# EAGLE board Open-Controller-Unitary_V1 (EAGLE 9.1.0), part 1 of 3
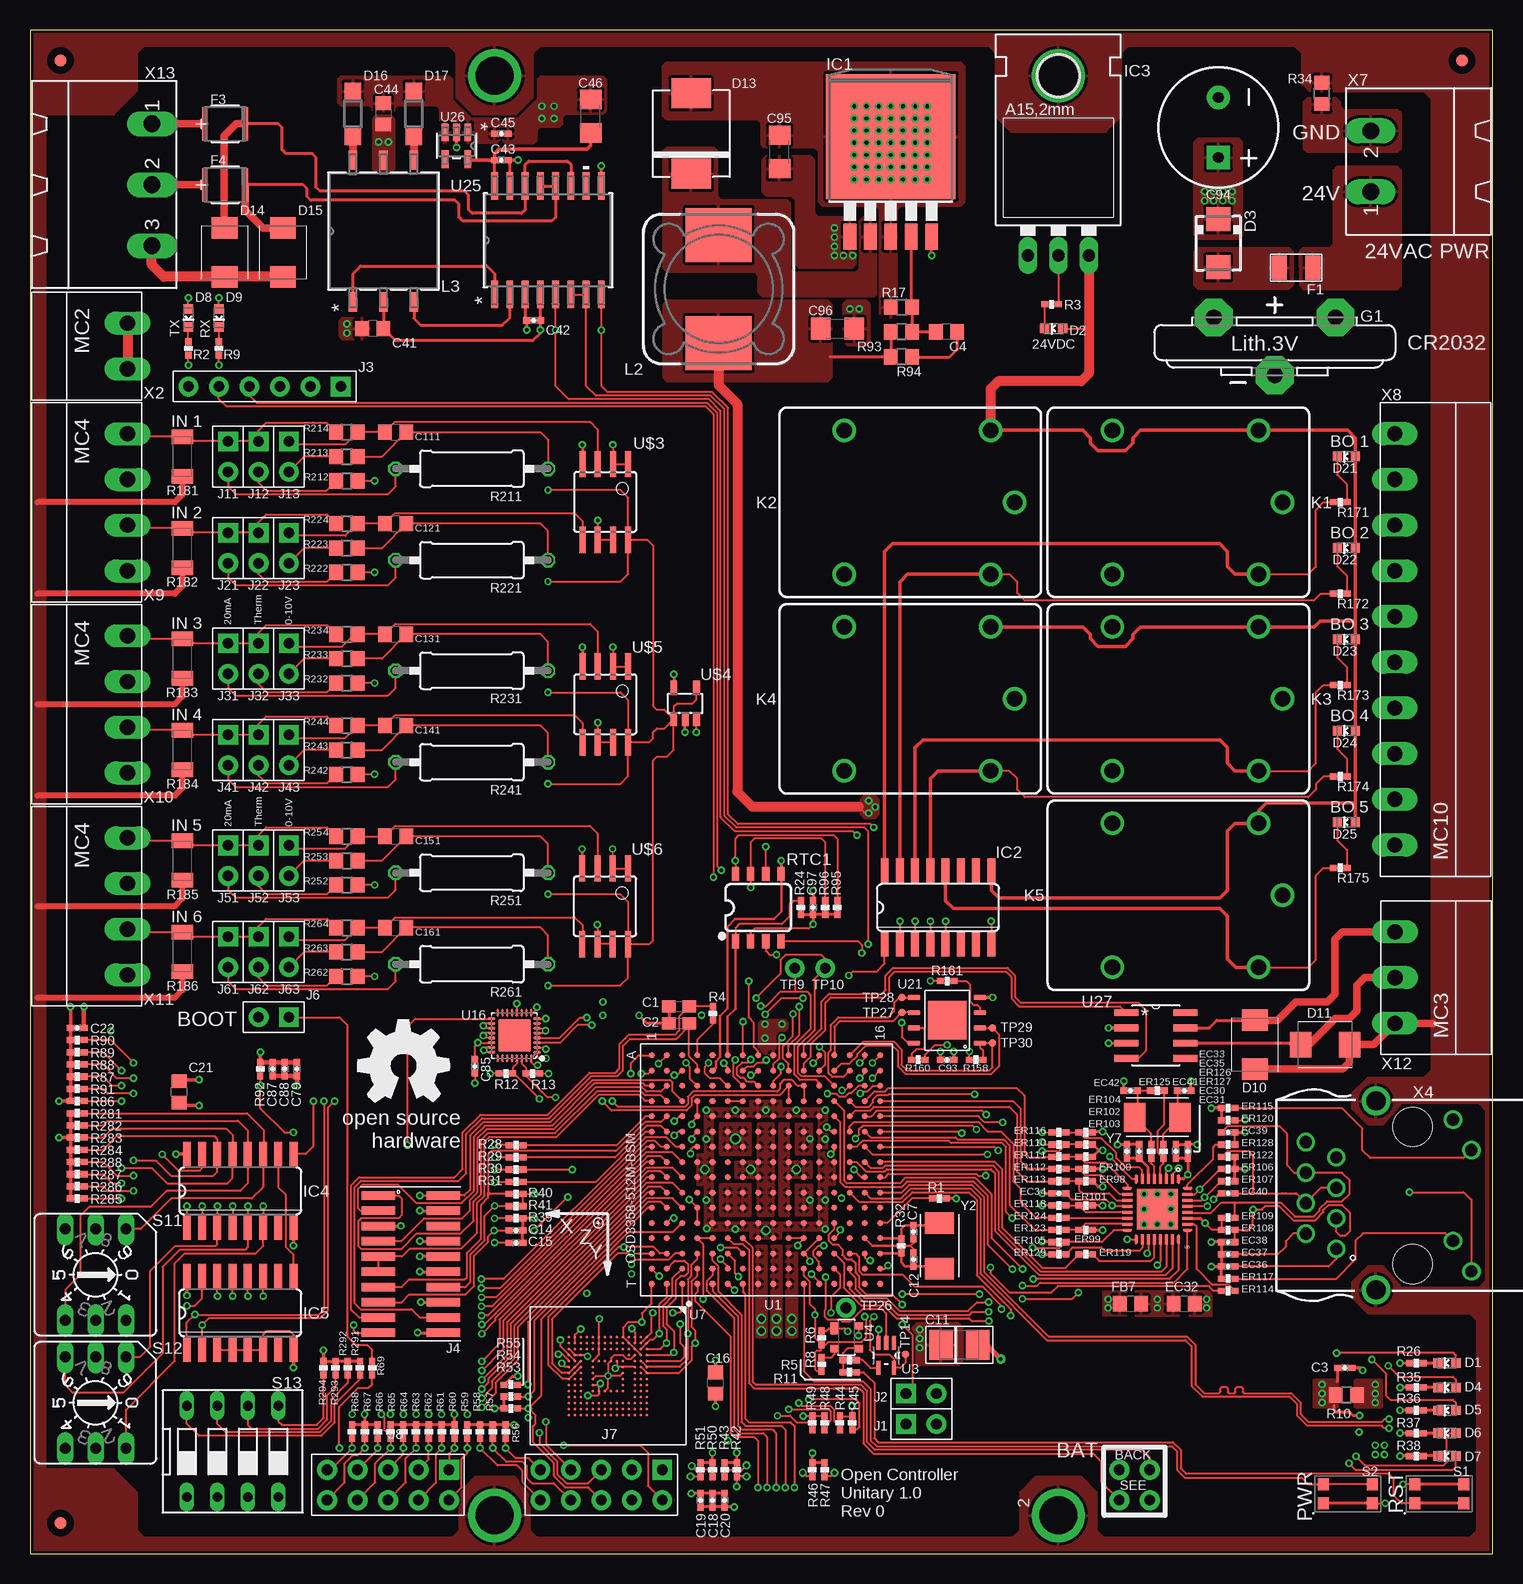
[diagram p0: board, top side]
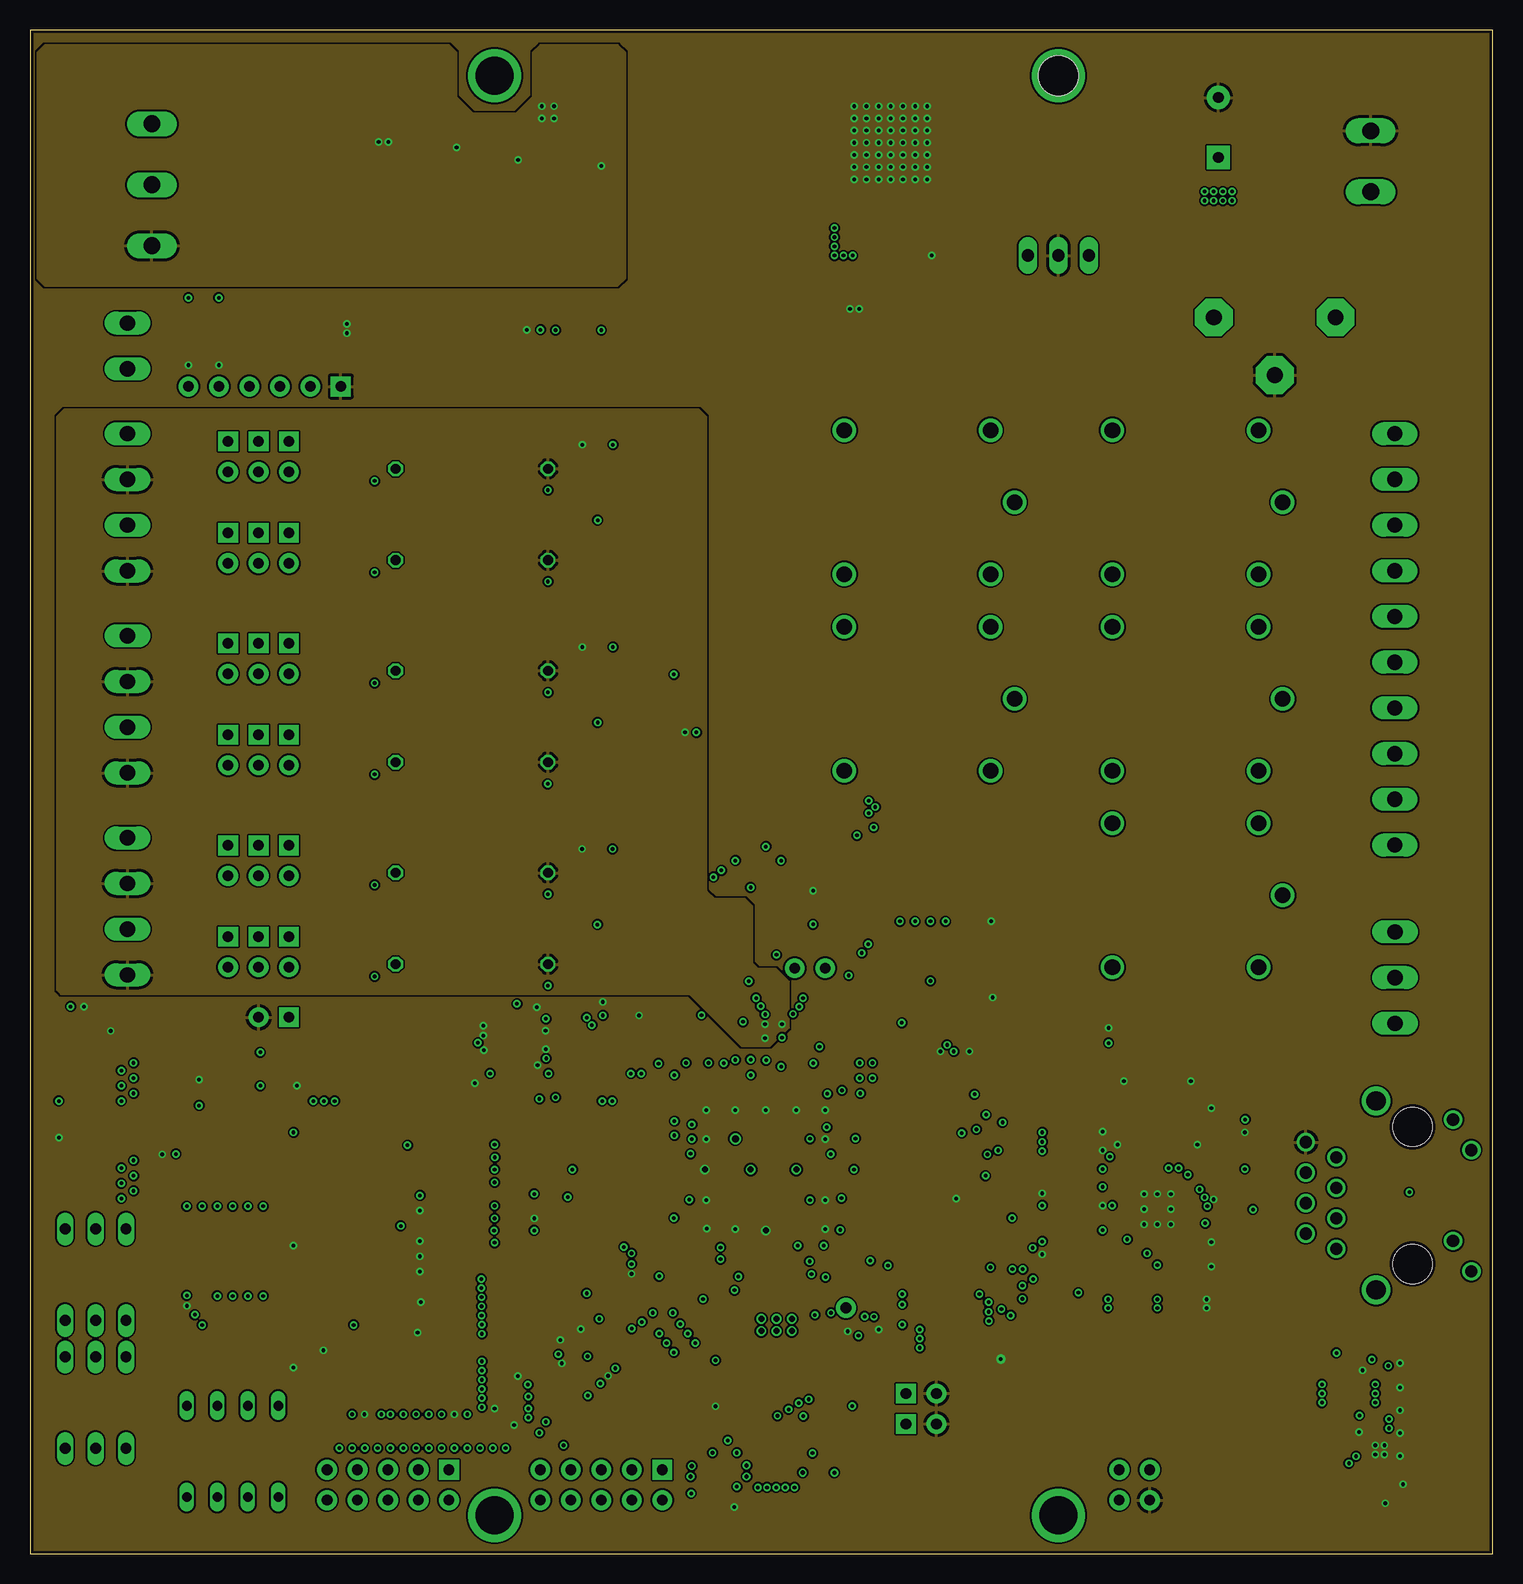
[diagram p1: board, inner layer Route2]
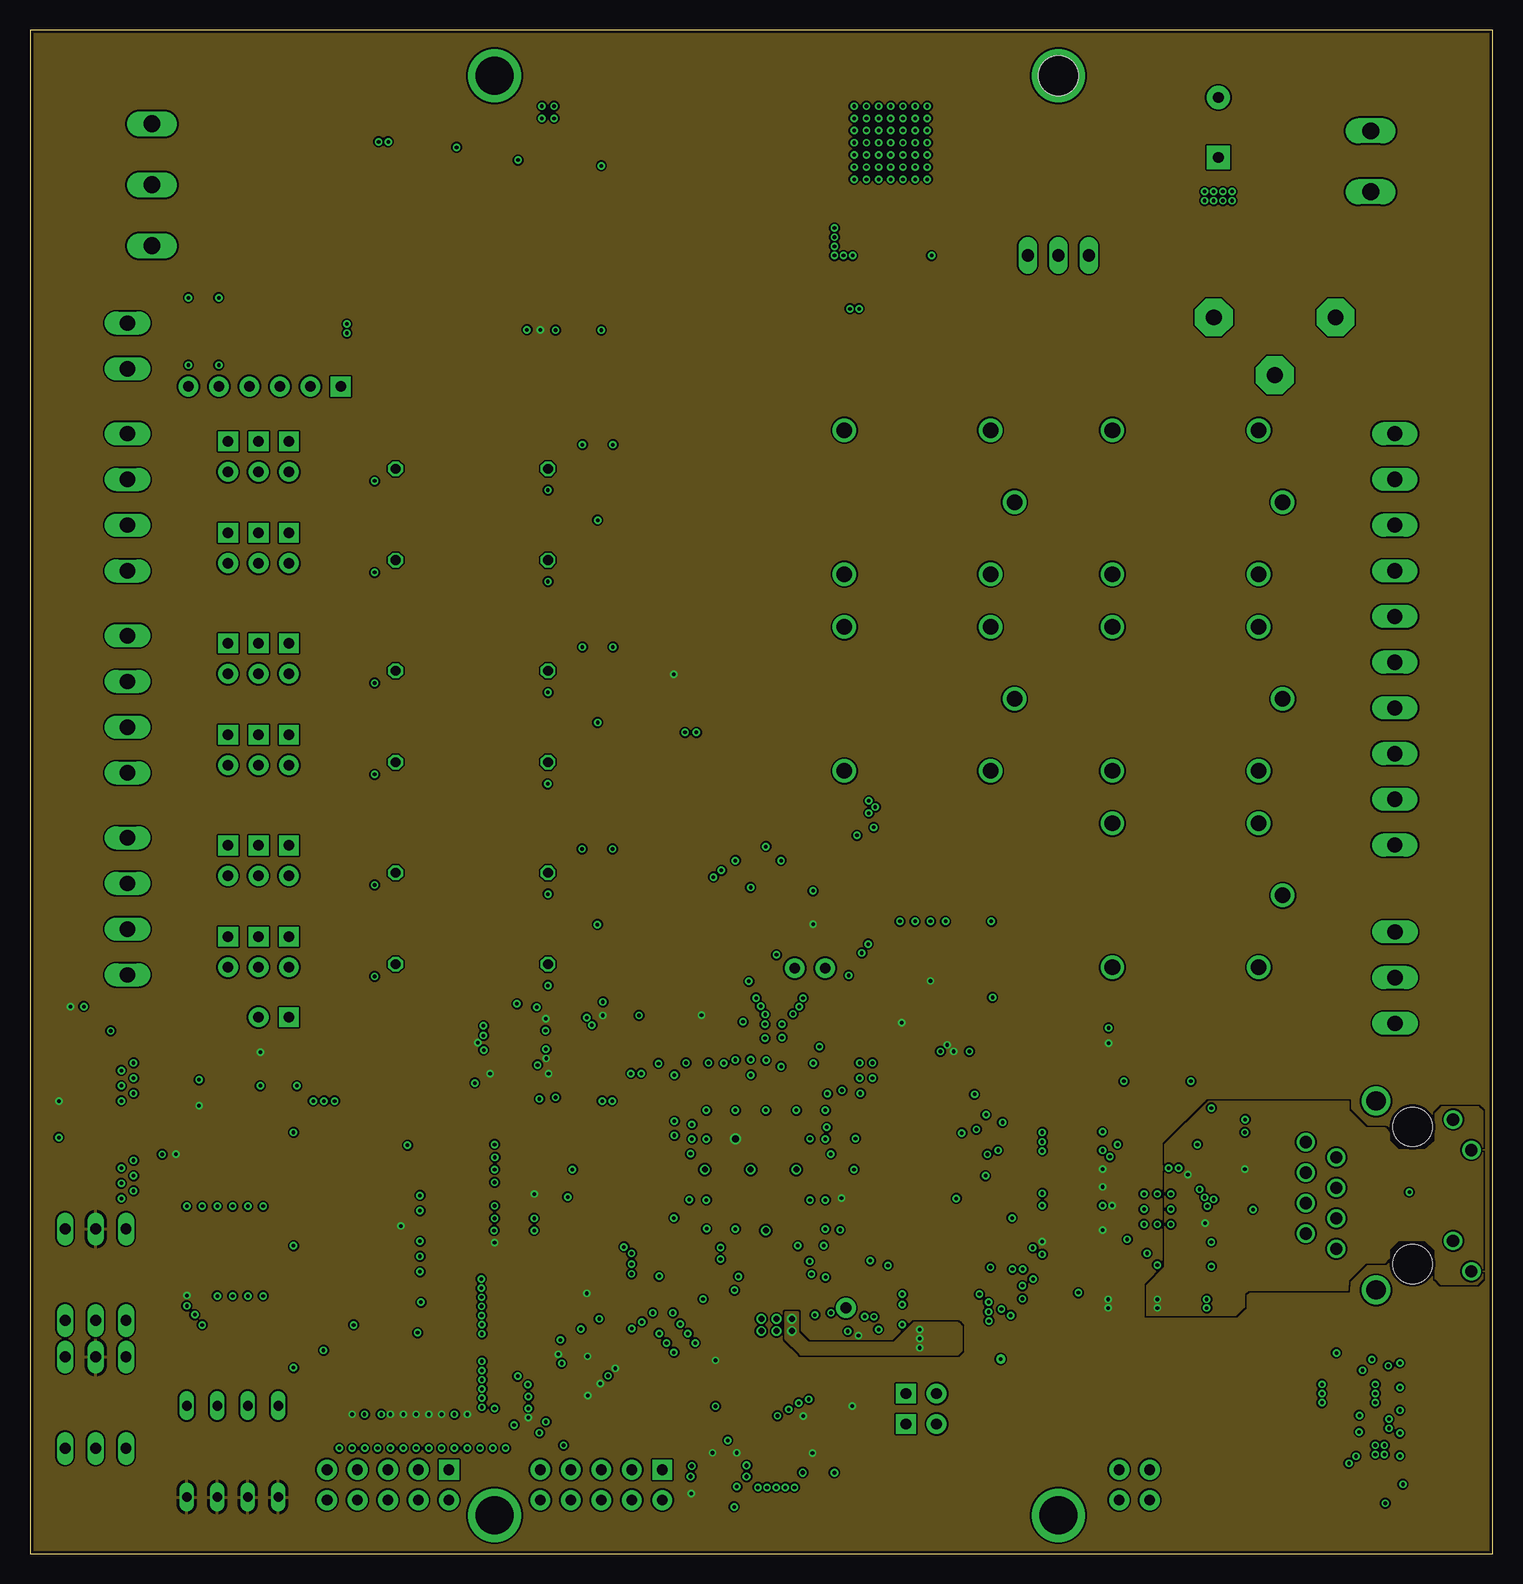
[diagram p2: board, inner layer Route15]
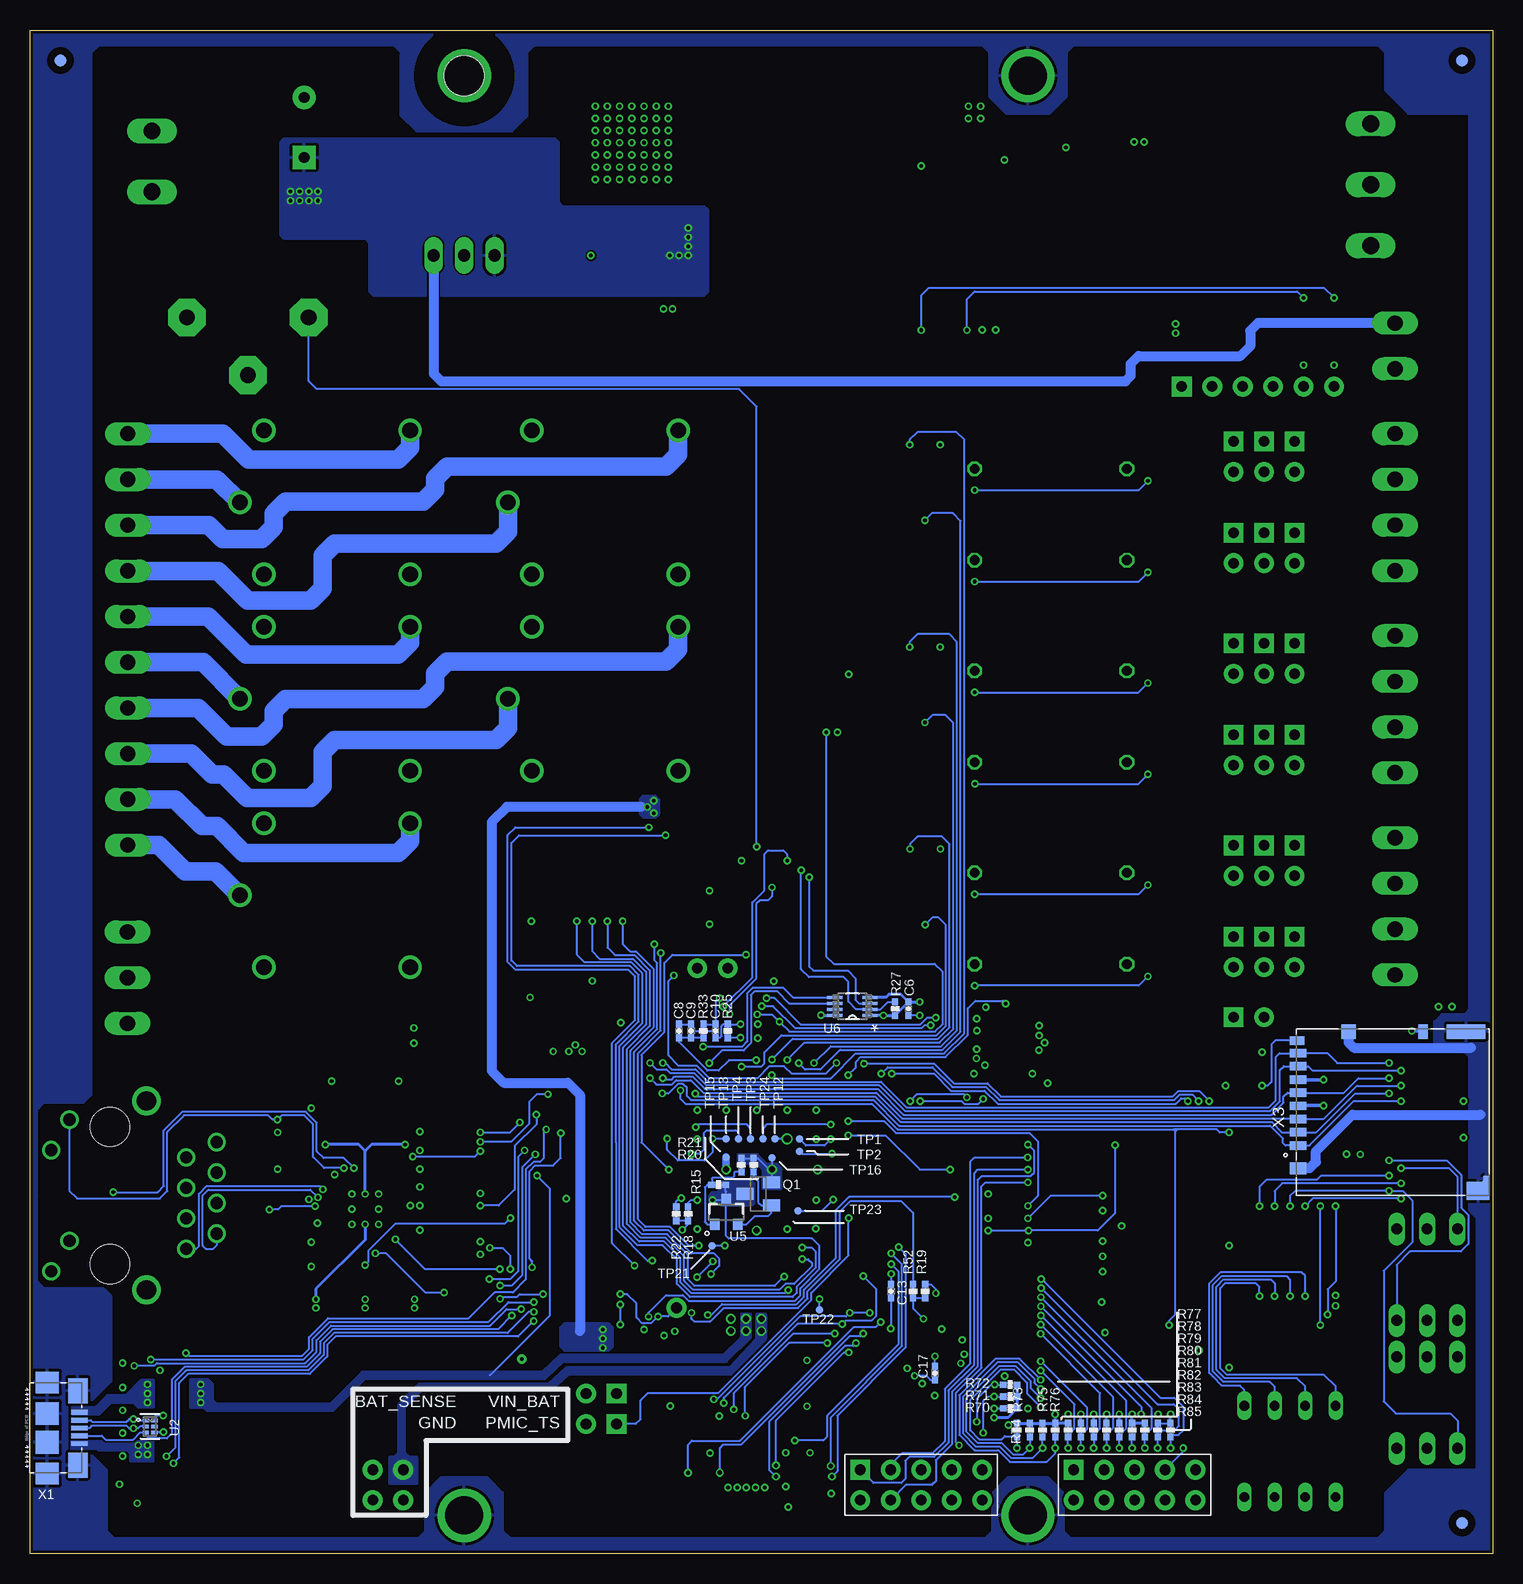
[diagram p3: board, bottom side, seen from below]

Size 121.92 x 127 mm. Coordinates in mm from the lower left corner, seen from the top.
Outline: 0,0 121.92,0 121.92,127 0,127 0,0
Copper layers (1*2*15*16): Top 0.035mm / dielectric 0.23mm / Route2 0.035mm / dielectric 0.93mm / Route15 0.035mm / dielectric 0.23mm / Bottom 0.035mm
Design rules "MF_Standard_4_Layer *": minimum track width 6mil, minimum drill 12mil, track to track 6mil, track to pad 6mil, pad to pad 6mil, via to via 6mil, smd to smd 0mil, copper to edge 10mil, drill to drill 10mil, minimum pad ring 6mil, minimum via ring 6mil, stop-mask expansion 2mil, vias tented up to drill 25mil, thermal gap 10mil
Net classes: 0 default: width 0.127 mm, drill 0.254 mm; 1 ground: width 0.152 mm, drill 0.254 mm, clearance 0.152 mm

## Footprints (pad centres in the part's own frame; a part is rotated, then mirrored left to right if it is on the bottom)
C0603 = smd 1.1 x 1: 1 -0.85,0; 2 0.85,0
C0402 = smd 0.61 x 0.508: 1 -0.559,0; 2 0.559,0
C0805 = smd 1.143 x 1.27: 1 -0.889,0; 2 0.889,0
B/3528-21R = smd 1.95 x 2.5: + 1.525,0; - -1.525,0
1206 = smd 1.6 x 1.8: 1 -1.4,0; 2 1.4,0
CPOL-RADIAL-5MM-10MM = drill 0.9 pad 1.93 square: + 2.5,0 | drill 0.9 pad 1.93: - -2.5,0
EIA-STD = smd 0.787 x 0.787: 1 -0.749,0; 2 0.749,0
SMA = smd 2 x 2: A 2,0; C -2,0
SMBJ = smd 1.78 x 2.16: A 2.04,0; C -2.03,0
SMC = smd 2.5 x 3.3: A 3.35,0; C -3.35,0
SOD123 = smd 1.4 x 1.4: A 1.9,0; C -1.9,0
R0402 = smd 0.61 x 0.508: 1 -0.559,0; 2 0.559,0
F1206W = smd 1.27 x 2.032: 1 -1.397,0; 2 1.397,0
FUS_MICROSMD010F_TYCO = smd 0.457 x 2.794: 1 -1.689,0; 2 1.689,0
FIDUCIAL_40MIL = smd 1.016 x 1.016: P$1 0,0
CR2032V = drill 1.321 pad 3.15 octagon: + -2.54,-5.08; +@1 -2.54,5.08; - 2.286,0
TO263-5 = smd 1.067 x 2.159: 1 -3.404,-5.791; 2 -1.702,-5.791; 3 0,-5.791; 4 1.702,-5.791; 5 3.404,-5.791 | smd 10.8 x 10.41: 6 0,2.54
SO16 = smd 0.66 x 2.032: 1 -4.445,-3.073; 2 -3.175,-3.073; 3 -1.905,-3.073; 4 -0.635,-3.073; 5 0.635,-3.073; 6 1.905,-3.073; 7 3.175,-3.073; 8 4.445,-3.073; 9 4.445,3.073; 10 3.175,3.073; 11 1.905,3.073; 12 0.635,3.073; 13 -0.635,3.073; 14 -1.905,3.073; 15 -3.175,3.073; 16 -4.445,3.073
78XXL = drill 1.016 long: GND 0,-3.81; IN -2.54,-3.81; OUT 2.54,-3.81 | hole 3.302: 0,11.176
H2-2.54 = drill 0.889 pad 1.651 square: 1 0,1.27 | drill 0.889 pad 1.651: 2 0,-1.27
H6-2.54 = drill 0.889 pad 1.651 square: 1 0,6.35 | drill 0.889 pad 1.651: 2 0,3.81; 3 0,1.27; 4 0,-1.27; 5 0,-3.81; 6 0,-6.35
CTI-JTAG = smd 2.794 x 0.711: 1 -2.705,5.715; 2 2.705,5.715; 3 -2.705,4.445; 4 2.705,4.445; 5 -2.705,3.175; 6 2.705,3.175; 7 -2.705,1.905; 8 2.705,1.905; 9 -2.705,0.635; 10 2.705,0.635; 11 -2.705,-0.635; 12 2.705,-0.635; 13 -2.705,-1.905; 14 2.705,-1.905; 15 -2.705,-3.175; 16 2.705,-3.175; 17 -2.705,-4.445; 18 2.705,-4.445; 19 -2.705,-5.715; 20 2.705,-5.715
H2X5-2.54 = drill 0.889 pad 1.651 square: 1 -1.27,5.08 | drill 0.889 pad 1.651: 2 1.27,5.08; 3 -1.27,2.54; 4 1.27,2.54; 5 -1.27,0; 6 1.27,0; 7 -1.27,-2.54; 8 1.27,-2.54; 9 -1.27,-5.08; 10 1.27,-5.08
JS-M = drill 1.3: 1 6.7,6; 2 6.7,-6; C 8.7,0; NC -5.5,-6; NO -5.5,6
MSS1260 = smd 5.5 x 4.5: 1 0,4.5; 2 0,-4.5
IND_78253_MC = smd 1.6 x 0.686: 1 -5.905,2.54; 2 -5.905,0; 3 -5.905,-2.54; 4 5.905,-2.54; 5 5.905,0; 6 5.905,2.54
MOUNTING_HOLE = drill 3.175 pad 4.445: P$1 0,0
SOT23-BEC = smd 1 x 1.4: B -0.95,-1.1; C 0,1.1; E 0.95,-1.1
R0805 = smd 1.143 x 1.27: 1 -0.889,0; 2 0.889,0
CT/CN1206 = smd 1.2 x 1.8: 1 -1.65,0; 2 1.65,0
0309/12 = drill 0.813 octagon: 1 -6.35,0; 2 6.35,0
SO08 = smd 0.6 x 1.2: 1 -1.905,-2.8; 2 -0.635,-2.8; 3 0.635,-2.8; 4 1.905,-2.8; 5 1.905,2.8; 6 0.635,2.8; 7 -0.635,2.8; 8 -1.905,2.8
SW4SMD_63X161LS = smd 0.9 x 1: 1 2.05,0.8; 2 2.05,-0.8; 3 -2.05,0.8; 4 -2.05,-0.8
P101 = drill 0.914 long: 1 3.81,-2.54; 2 -3.81,2.54; 4 3.81,2.54; 8 -3.81,-2.54; C 3.81,0; C1 -3.81,0
DS-04 = drill 0.813 long: 1 -3.81,-3.81; 2 -1.27,-3.81; 3 1.27,-3.81; 4 3.81,-3.81; 5 3.81,3.81; 6 1.27,3.81; 7 -1.27,3.81; 8 -3.81,3.81
TP_B0,65 = smd 0.635 x 0.635: TP 0,0
TESTPAD/W_HOLE_1X1 = drill 0.889 pad 1.651: P$1 0,0
OSD335X-BGA-256 = smd 0.5 x 0.5: A1 -9.525,-9.525; A2 -9.525,-8.255; A3 -9.525,-6.985; A4 -9.525,-5.715; A5 -9.525,-4.445; A6 -9.525,-3.175; A7 -9.525,-1.905; A8 -9.525,-0.635; A9 -9.525,0.635; A10 -9.525,1.905; A11 -9.525,3.175; A12 -9.525,4.445; A13 -9.525,5.715; A14 -9.525,6.985; A15 -9.525,8.255; A16 -9.525,9.525; B1 -8.255,-9.525; B2 -8.255,-8.255; B3 -8.255,-6.985; B4 -8.255,-5.715; B5 -8.255,-4.445; B6 -8.255,-3.175; B7 -8.255,-1.905; B8 -8.255,-0.635; B9 -8.255,0.635; B10 -8.255,1.905; B11 -8.255,3.175; B12 -8.255,4.445; B13 -8.255,5.715; B14 -8.255,6.985; B15 -8.255,8.255; B16 -8.255,9.525; C1 -6.985,-9.525; C2 -6.985,-8.255; C3 -6.985,-6.985; C4 -6.985,-5.715; C5 -6.985,-4.445; C6 -6.985,-3.175; C7 -6.985,-1.905; C8 -6.985,-0.635; C9 -6.985,0.635; C10 -6.985,1.905; C11 -6.985,3.175; C12 -6.985,4.445; C13 -6.985,5.715; C14 -6.985,6.985; C15 -6.985,8.255; C16 -6.985,9.525; D1 -5.715,-9.525; D2 -5.715,-8.255; D3 -5.715,-6.985; D4 -5.715,-5.715; D5 -5.715,-4.445; D6 -5.715,-3.175; D7 -5.715,-1.905; D8 -5.715,-0.635; D9 -5.715,0.635; D10 -5.715,1.905; D11 -5.715,3.175; D12 -5.715,4.445; D13 -5.715,5.715; D14 -5.715,6.985; D15 -5.715,8.255; D16 -5.715,9.525; E1 -4.445,-9.525; E2 -4.445,-8.255; E3 -4.445,-6.985; E4 -4.445,-5.715; E5 -4.445,-4.445; E6 -4.445,-3.175; E7 -4.445,-1.905; E8 -4.445,-0.635; E9 -4.445,0.635; E10 -4.445,1.905; E11 -4.445,3.175; E12 -4.445,4.445; E13 -4.445,5.715; E14 -4.445,6.985; E15 -4.445,8.255; E16 -4.445,9.525; F1 -3.175,-9.525; F2 -3.175,-8.255; F3 -3.175,-6.985; F4 -3.175,-5.715; F5 -3.175,-4.445; F6 -3.175,-3.175; F7 -3.175,-1.905; F8 -3.175,-0.635; F9 -3.175,0.635; F10 -3.175,1.905; F11 -3.175,3.175; F12 -3.175,4.445; F13 -3.175,5.715; F14 -3.175,6.985; F15 -3.175,8.255; F16 -3.175,9.525; G1 -1.905,-9.525; G2 -1.905,-8.255; G3 -1.905,-6.985; G4 -1.905,-5.715; G5 -1.905,-4.445; G6 -1.905,-3.175; G7 -1.905,-1.905; G8 -1.905,-0.635; G9 -1.905,0.635; G10 -1.905,1.905; G11 -1.905,3.175; G12 -1.905,4.445; G13 -1.905,5.715; G14 -1.905,6.985; G15 -1.905,8.255; G16 -1.905,9.525; H1 -0.635,-9.525; H2 -0.635,-8.255; H3 -0.635,-6.985; H4 -0.635,-5.715; H5 -0.635,-4.445; H6 -0.635,-3.175; H7 -0.635,-1.905; H8 -0.635,-0.635; H9 -0.635,0.635; H10 -0.635,1.905; H11 -0.635,3.175; H12 -0.635,4.445; H13 -0.635,5.715; H14 -0.635,6.985; H15 -0.635,8.255; H16 -0.635,9.525; J1 0.635,-9.525; J2 0.635,-8.255; J3 0.635,-6.985; J4 0.635,-5.715; J5 0.635,-4.445; J6 0.635,-3.175; J7 0.635,-1.905; J8 0.635,-0.635; J9 0.635,0.635; J10 0.635,1.905; J11 0.635,3.175; J12 0.635,4.445; J13 0.635,5.715; J14 0.635,6.985; J15 0.635,8.255; J16 0.635,9.525; K1 1.905,-9.525; K2 1.905,-8.255; K3 1.905,-6.985; K4 1.905,-5.715; K5 1.905,-4.445; K6 1.905,-3.175; K7 1.905,-1.905; K8 1.905,-0.635; K9 1.905,0.635; K10 1.905,1.905; K11 1.905,3.175; K12 1.905,4.445; K13 1.905,5.715; K14 1.905,6.985; K15 1.905,8.255; K16 1.905,9.525; L1 3.175,-9.525; L2 3.175,-8.255; L3 3.175,-6.985; L4 3.175,-5.715; L5 3.175,-4.445; L6 3.175,-3.175; L7 3.175,-1.905; L8 3.175,-0.635; L9 3.175,0.635; L10 3.175,1.905; L11 3.175,3.175; L12 3.175,4.445; L13 3.175,5.715; L14 3.175,6.985; L15 3.175,8.255; L16 3.175,9.525; M1 4.445,-9.525; M2 4.445,-8.255; M3 4.445,-6.985; M4 4.445,-5.715; M5 4.445,-4.445; M6 4.445,-3.175; M7 4.445,-1.905; M8 4.445,-0.635; M9 4.445,0.635; M10 4.445,1.905; M11 4.445,3.175; M12 4.445,4.445; M13 4.445,5.715; M14 4.445,6.985; M15 4.445,8.255; M16 4.445,9.525; N1 5.715,-9.525; N2 5.715,-8.255; N3 5.715,-6.985; N4 5.715,-5.715; N5 5.715,-4.445; N6 5.715,-3.175; N7 5.715,-1.905; N8 5.715,-0.635; N9 5.715,0.635; N10 5.715,1.905; N11 5.715,3.175; N12 5.715,4.445; N13 5.715,5.715; N14 5.715,6.985; N15 5.715,8.255; N16 5.715,9.525; P1 6.985,-9.525; P2 6.985,-8.255; P3 6.985,-6.985; P4 6.985,-5.715; P5 6.985,-4.445; P6 6.985,-3.175; P7 6.985,-1.905; P8 6.985,-0.635; P9 6.985,0.635; P10 6.985,1.905; P11 6.985,3.175; P12 6.985,4.445; P13 6.985,5.715; P14 6.985,6.985; P15 6.985,8.255; P16 6.985,9.525; R1 8.255,-9.525; R2 8.255,-8.255; R3 8.255,-6.985; R4 8.255,-5.715; R5 8.255,-4.445; R6 8.255,-3.175; R7 8.255,-1.905; R8 8.255,-0.635; R9 8.255,0.635; R10 8.255,1.905; R11 8.255,3.175; R12 8.255,4.445; R13 8.255,5.715; R14 8.255,6.985; R15 8.255,8.255; R16 8.255,9.525; T1 9.525,-9.525; T2 9.525,-8.255; T3 9.525,-6.985; T4 9.525,-5.715; T5 9.525,-4.445; T6 9.525,-3.175; T7 9.525,-1.905; T8 9.525,-0.635; T9 9.525,0.635; T10 9.525,1.905; T11 9.525,3.175; T12 9.525,4.445; T13 9.525,5.715; T14 9.525,6.985; T15 9.525,8.255; T16 9.525,9.525
DRY6 = smd 0.55 x 0.3: 1 -0.355,0.5 | smd 0.52 x 0.3: 2 -0.37,0; 3 -0.37,-0.5; 4 0.37,-0.5; 5 0.37,0; 6 0.37,0.5
DCK5 = smd 1.168 x 0.356: 1 -1.041,0.65; 2 -1.041,0; 3 -1.041,-0.65; 4 1.041,-0.65; 5 1.041,0.65
SOT143-R = smd 1 x 0.7: 1 -0.75,-1 | smd 0.6 x 0.7: 2 0.95,-1; 3 0.95,1; 4 -0.95,1
SOT23-3 = smd 0.8 x 0.9: 1 -0.95,-1; 2 0.95,-1; 3 0,1.1
DCU8 = smd 1.27 x 0.254: 1 -1.473,0.749; 2 -1.473,0.249; 3 -1.473,-0.249; 4 -1.473,-0.749; 5 1.473,-0.749; 6 1.473,-0.249; 7 1.473,0.249; 8 1.473,0.749
MICRON_EMMC_153 = smd 0.245 x 0.245: A1 -3.25,3.25; A2 -2.75,3.25; A3 -2.25,3.25; A4 -1.75,3.25; A5 -1.25,3.25; A6 -0.75,3.25; A7 -0.25,3.25; A8 0.25,3.25; A9 0.75,3.25; A10 1.25,3.25; A11 1.75,3.25; A12 2.25,3.25; A13 2.75,3.25; A14 3.25,3.25; B1 -3.25,2.75; B2 -2.75,2.75; B3 -2.25,2.75; B4 -1.75,2.75; B5 -1.25,2.75; B6 -0.75,2.75; B7 -0.25,2.75; B8 0.25,2.75; B9 0.75,2.75; B10 1.25,2.75; B11 1.75,2.75; B12 2.25,2.75; B13 2.75,2.75; B14 3.25,2.75; C1 -3.25,2.25; C2 -2.75,2.25; C3 -2.25,2.25; C4 -1.75,2.25; C5 -1.25,2.25; C6 -0.75,2.25; C7 -0.25,2.25; C8 0.25,2.25; C9 0.75,2.25; C10 1.25,2.25; C11 1.75,2.25; C12 2.25,2.25; C13 2.75,2.25; C14 3.25,2.25; D1 -3.25,1.75; D2 -2.75,1.75; D3 -2.25,1.75; D4 -1.75,1.75; D12 2.25,1.75; D13 2.75,1.75; D14 3.25,1.75; E1 -3.25,1.25; E2 -2.75,1.25; E3 -2.25,1.25; E5 -1.25,1.25; E6 -0.75,1.25; E7 -0.25,1.25; E8 0.25,1.25; E9 0.75,1.25; E10 1.25,1.25; E12 2.25,1.25; E13 2.75,1.25; E14 3.25,1.25; F1 -3.25,0.75; F2 -2.75,0.75; F3 -2.25,0.75; F5 -1.25,0.75; F10 1.25,0.75; F12 2.25,0.75; F13 2.75,0.75; F14 3.25,0.75; G1 -3.25,0.25; G2 -2.75,0.25; G3 -2.25,0.25; G5 -1.25,0.25; G10 1.25,0.25; G12 2.25,0.25; G13 2.75,0.25; G14 3.25,0.25; H1 -3.25,-0.25; H2 -2.75,-0.25; H3 -2.25,-0.25; H5 -1.25,-0.25; H10 1.25,-0.25; H12 2.25,-0.25; H13 2.75,-0.25; H14 3.25,-0.25; J1 -3.25,-0.75; J2 -2.75,-0.75; J3 -2.25,-0.75; J5 -1.25,-0.75; J10 1.25,-0.75; J12 2.25,-0.75; J13 2.75,-0.75; J14 3.25,-0.75; K1 -3.25,-1.25; K2 -2.75,-1.25; K3 -2.25,-1.25; K5 -1.25,-1.25; K6 -0.75,-1.25; K7 -0.25,-1.25; K8 0.25,-1.25; K9 0.75,-1.25; K10 1.25,-1.25; K12 2.25,-1.25; K13 2.75,-1.25; K14 3.25,-1.25; L1 -3.25,-1.75; L2 -2.75,-1.75; L3 -2.25,-1.75; L12 2.25,-1.75; L13 2.75,-1.75; L14 3.25,-1.75; M1 -3.25,-2.25; M2 -2.75,-2.25; M3 -2.25,-2.25; M4 -1.75,-2.25; M5 -1.25,-2.25; M6 -0.75,-2.25; M7 -0.25,-2.25; M8 0.25,-2.25; M9 0.75,-2.25; M10 1.25,-2.25; M11 1.75,-2.25; M12 2.25,-2.25; M13 2.75,-2.25; M14 3.25,-2.25; N1 -3.25,-2.75; N2 -2.75,-2.75; N3 -2.25,-2.75; N4 -1.75,-2.75; N5 -1.25,-2.75; N6 -0.75,-2.75; N7 -0.25,-2.75; N8 0.25,-2.75; N9 0.75,-2.75; N10 1.25,-2.75; N11 1.75,-2.75; N12 2.25,-2.75; N13 2.75,-2.75; N14 3.25,-2.75; P1 -3.25,-3.25; P2 -2.75,-3.25; P3 -2.25,-3.25; P4 -1.75,-3.25; P5 -1.25,-3.25; P6 -0.75,-3.25; P7 -0.25,-3.25; P8 0.25,-3.25; P9 0.75,-3.25; P10 1.25,-3.25; P11 1.75,-3.25; P12 2.25,-3.25; P13 2.75,-3.25; P14 3.25,-3.25
LAN8710A-QFN32 = smd 0.254 x 0.838: 1 -1.751,-2.515; 2 -1.251,-2.515; 3 -0.751,-2.515; 4 -0.251,-2.515; 5 0.251,-2.515; 6 0.751,-2.515; 7 1.251,-2.515; 8 1.751,-2.515; 17 1.751,2.515; 18 1.251,2.515; 19 0.751,2.515; 20 0.251,2.515; 21 -0.251,2.515; 22 -0.751,2.515; 23 -1.251,2.515; 24 -1.751,2.515 | smd 0.838 x 0.254: 9 2.515,-1.751; 10 2.515,-1.251; 11 2.515,-0.751; 12 2.515,-0.251; 13 2.515,0.251; 14 2.515,0.751; 15 2.515,1.251; 16 2.515,1.751; 25 -2.515,1.751; 26 -2.515,1.251; 27 -2.515,0.751; 28 -2.515,0.251; 29 -2.515,-0.251; 30 -2.515,-0.751; 31 -2.515,-1.251; 32 -2.515,-1.751 | smd 3.404 x 3.404: 33 0,0
QFN32-0.4-4X4MM = smd 0.6 x 0.2: 1 -1.9,1.4; 2 -1.9,1; 3 -1.9,0.6; 4 -1.9,0.2; 5 -1.9,-0.2; 6 -1.9,-0.6; 7 -1.9,-1; 8 -1.9,-1.4; 17 1.9,-1.4; 18 1.9,-1; 19 1.9,-0.6; 20 1.9,-0.2; 21 1.9,0.2; 22 1.9,0.6; 23 1.9,1; 24 1.9,1.4 | smd 0.2 x 0.6: 9 -1.4,-1.9; 10 -1,-1.9; 11 -0.6,-1.9; 12 -0.2,-1.9; 13 0.2,-1.9; 14 0.6,-1.9; 15 1,-1.9; 16 1.4,-1.9; 25 1.4,1.9; 26 1,1.9; 27 0.6,1.9; 28 0.2,1.9; 29 -0.2,1.9; 30 -0.6,1.9; 31 -1,1.9; 32 -1.4,1.9 | smd 2.7 x 2.7: 33 0,0
W-PDFN-8 = smd 1.05 x 0.45: 1 -2.75,1.905; 2 -2.75,0.635; 3 -2.75,-0.635; 4 -2.75,-1.905; 5 2.75,-1.905; 6 2.75,-0.635; 7 2.75,0.635; 8 2.75,1.905 | smd 3.2 x 3.2: PAD 0,0
DW16 = smd 2.311 x 0.559: 1 -4.521,4.445; 2 -4.521,3.175; 3 -4.521,1.905; 4 -4.521,0.635; 5 -4.521,-0.635; 6 -4.521,-1.905; 7 -4.521,-3.175; 8 -4.521,-4.445; 9 4.521,-4.445; 10 4.521,-3.175; 11 4.521,-1.905; 12 4.521,-0.635; 13 4.521,0.635; 14 4.521,1.905; 15 4.521,3.175; 16 4.521,4.445
DBV5 = smd 1.473 x 0.559: 1 -1.118,0.95; 2 -1.118,0; 3 -1.118,-0.95; 4 1.118,-0.95; 5 1.118,0.95
BEAGLEBONE_BLUE_D8 = smd 1.981 x 0.559: 1 -2.464,1.905; 2 -2.464,0.635; 3 -2.464,-0.635; 4 -2.464,-1.905; 5 2.464,-1.905; 6 2.464,-0.635; 7 2.464,0.635; 8 2.464,1.905
SOIC8 = smd 0.5 x 2.2: 1 -1.905,-3.154; 2 -0.645,-3.154; 3 0.625,-3.154; 4 1.895,-3.154; 5 1.905,3.154; 6 0.635,3.154; 7 -0.635,3.154; 8 -1.905,3.154
SOT23-5 = smd 0.55 x 1.2: 1 -0.95,-1.3; 2 0,-1.3; 3 0.95,-1.3; 4 0.95,1.3; 5 -0.95,1.3
10118192-0001LF(MICRO-USB-B-AMPHENOL-FCI) = smd 1.8 x 1.9: CGND1 -3.8,0; CGND4 3.8,0 | smd 1.9 x 1.9: CGND2 -1.2,0; CGND3 1.2,0 | smd 2.1 x 1.6: CGND5 3.1,2.55; CGND6 -3.1,2.55 | smd 0.4 x 1.35: D+ 0,2.675; D- -0.65,2.675; GND 1.3,2.675; ID 0.65,2.675; VBUS -1.3,2.675
MC2 = drill 1.27 long: 1 -1.905,0; 2 1.905,0
DM3BT-DSF-PEJS = smd 0.7 x 1.4: 1 -3.2,15.95; 2 -2.1,15.95; 3 -1,15.95; 4 0.1,15.95; 5 1.2,15.95; 6 2.3,15.95; 7 3.4,15.95; 8 4.5,15.95 | smd 0.7 x 1.2: CD 5.55,16.05 | smd 0.5 x 0.5: CGND1 -6,0.25 | smd 1.5 x 1.9: CGND2 -7,0.95 | smd 0.21 x 0.21 rotated 45: CGND3 -6.25,0.5 | smd 1 x 1.4: CGND4 -5.1,15.95 | smd 1.2 x 1.2: CGND5 6.3,11.75 | smd 1.2 x 3.2: CGND6 6.3,1.95 | smd 1.2 x 0.8: GND 6.3,5.55
SI-50170 = drill 1.016 pad 1.524: 1 4.445,-6.413; 2 3.175,-8.954; 3 1.905,-6.413; 4 0.635,-8.954; 5 -0.635,-6.413; 6 -1.905,-8.954; 7 -3.175,-6.413; 8 -4.445,-8.954; A1 -6.325,3.315; A2 3.785,3.315; C1 -3.785,4.839; C2 6.325,4.839 | drill 1.6 pad 2.286: S1 -7.874,-3.111; S2 7.874,-3.111 | hole 3.251: -5.715,-0.064; 5.715,-0.064
MSTBA2 = drill 1.397 long: 1 -2.54,5.08; 2 2.54,5.08
MC10 = drill 1.27 long: 1 -17.145,0; 2 -13.335,0; 3 -9.525,0; 4 -5.715,0; 5 -1.905,0; 6 1.905,0; 7 5.715,0; 8 9.525,0; 9 13.335,0; 10 17.145,0
MC4 = drill 1.27 long: 1 -5.715,0; 2 -1.905,0; 3 1.905,0; 4 5.715,0
MC3 = drill 1.27 long: 1 -3.81,0; 2 0,0; 3 3.81,0
MSTBA3 = drill 1.397 long: 1 -5.08,5.08; 2 0,5.08; 3 5.08,5.08
CRYSTAL-TXC-7A = smd 1.788 x 2.413: P$1 1.9,0; P$2 -1.9,0

## Placement (x,y rotation side)
C1  DNI  [C0603]  54.1,45.59 0 top
C2  DNI  [C0603]  54.1,44.2 0 top
C3  0.1uF, 6.3V  [C0402]  109.6,15.49 0 top
C4  330pF, DNI  [C0805]  76.4,101.83 180 top
C6  0.1uF, 6.3V  [C0402]  48.69,45.42 270 bottom
C7  18pF, 50V  [C0402]  73.66,26.8 270 top
C8  1nF  [C0402]  67.82,43.56 90 bottom
C9  0.1uF, 6.3V  [C0402]  66.8,43.56 90 bottom
C10  0.1uF, 6.3V  [C0402]  64.77,43.56 270 bottom
C11  220uF, 6.3V  [B/3528-21R]  77.47,17.4 180 top
C12  18pF, 50V  [C0402]  73.66,24.51 90 top
C13  2.2uF, 6.3V  [C0402]  50.14,21.87 270 bottom
C14  0.1uF, 6.3V  [C0402]  40.51,26.92 0 top
C15  0.1uF, 6.3V  [C0402]  40.51,25.91 0 top
C16  10uF, 10V  [C0805]  57.15,14.22 90 top
C17  0.1uF, 6.3V  [C0402]  46.48,15.04 90 bottom
C18  0.1uF, 6.3V  [C0402]  56.9,4.45 90 top
C19  0.1uF, 6.3V  [C0402]  55.88,4.45 90 top
C20  0.1uF, 6.3V  [C0402]  57.91,4.45 90 top
C21  10uF, 10V  [C0805]  12.45,38.48 90 top
C22  0.1uF, 6.3V  [C0402]  3.94,43.81 0 top
C41  10uF, 16V  [C0805]  28.57,102.11 180 top
C42  0.1uF, 16V  [C0402]  41.99,102.79 180 top
C43  0.1uF, 16V  [C0402]  39.29,116.15 0 top
C44  10uF, 16V  [C0805]  29.46,120.02 270 top
C45  0.1uF, 16V  [C0402]  39.29,118.36 0 top
C46  4.7uF  [1206]  46.74,119.81 90 top
C79  0.1uF, 6.3V  [C0402]  22.25,40.39 270 top
C85  2200pF, 6.3V  [C0402]  37.08,40.61 270 top
C87  2200pF, 6.3V  [C0402]  20.22,40.39 270 top
C88  2200pF, 6.3V  [C0402]  21.23,40.39 270 top
C93  0.1uF, 6.3V  [C0402]  76.45,41.15 180 top
C94  1mF  [CPOL-RADIAL-5MM-10MM]  99.06,118.87 270 top
C95  4.7uF  [1206]  62.48,116.84 90 top
C96  4.7uF  [1206]  67.31,102.11 0 top
C97  0.1uF, 6.3V  [C0402]  65.28,53.85 90 top
C111  1uF  [C0805]  30.48,93.47 0 top
C121  1uF  [C0805]  30.48,85.85 0 top
C131  1uF  [C0805]  30.48,76.63 0 top
C141  1uF  [C0805]  30.48,69.01 0 top
C151  1uF  [C0805]  30.48,59.79 0 top
C161  1uF  [C0805]  30.48,52.17 0 top
D1  LTST-C191KFKT  [EIA-STD]  118.11,15.88 180 top
D2  LTST-C191KFKT  [EIA-STD]  85.34,102.11 180 top
D3  S1D  [SMA]  99.06,109.22 270 top
D4  LTST-C191KGKT  [EIA-STD]  118.11,13.84 180 top
D5  LTST-C191KGKT  [EIA-STD]  118.11,11.94 180 top
D6  LTST-C191KGKT  [EIA-STD]  118.11,10.03 180 top
D7  LTST-C191KGKT  [EIA-STD]  118.11,8.13 180 top
D8  LTST-C191KGKT  [EIA-STD]  13.21,103 270 top
D9  LTST-C191KFKT  [EIA-STD]  15.75,103 270 top
D10  SMBJ7.0CA  [SMBJ]  102.11,42.42 270 top
D11  SMBJ7.0CA  [SMBJ]  107.95,42.42 0 top
D13  B550C-13-F  [SMC]  55.12,118.36 90 top
D14  SMBJ12CA  [SMBJ]  16.23,108.46 270 top
D15  SMBJ12CA  [SMBJ]  21.08,108.46 270 top
D16  MBR0520LT  [SOD123]  26.92,120.02 270 top
D17  MBR0520LT  [SOD123]  32,120.02 270 top
D21  LTST-C191KFKT  [EIA-STD]  109.73,91.44 180 top
D22  LTST-C191KFKT  [EIA-STD]  109.73,83.82 180 top
D23  LTST-C191KFKT  [EIA-STD]  109.73,76.2 180 top
D24  LTST-C191KFKT  [EIA-STD]  109.73,68.58 180 top
D25  LTST-C191KFKT  [EIA-STD]  109.73,60.96 180 top
EC30  0.1uF, 6.3V  [C0402]  95.5,33.53 90 top
EC31  0.1uF, 6.3V  [C0402]  96.52,33.53 90 top
EC32  10uF, 10V  [C0805]  96.22,20.83 0 top
EC33  1uF, 10V  [C0402]  91.44,33.53 90 top
EC34  0.1uF, 6.3V  [C0402]  85.78,30.02 180 top
EC35  470pF, 6.3V  [C0402]  92.46,33.53 90 top
EC36  15pF, DNI  [C0402]  99.87,23.93 180 top
EC37  15pF, DNI  [C0402]  99.87,24.94 180 top
EC38  15pF, DNI  [C0402]  99.87,25.96 180 top
EC39  15pF, DNI  [C0402]  99.87,35.1 0 top
EC40  0.022uF, 10V  [C0402]  99.87,30.02 180 top
EC41  30pF, 50V  [C0402]  96.22,38.58 0 top
EC42  30pF, 50V  [C0402]  91.74,38.58 180 top
ER98  1.5K, 1%  [R0402]  88.01,31.04 180 top
ER99  1.5K, 1%  [R0402]  88.01,26.97 180 top
ER100  1.5K, 1%  [R0402]  88.01,32.05 180 top
ER101  10K, 1%  [R0402]  88.01,29.01 0 top
ER102  10K, 1%  [R0402]  88.01,34.09 0 top
ER103  10K, 1%  [R0402]  88.01,33.07 0 top
ER104  10K, 1%  [R0402]  88.01,35.1 0 top
ER105  1.5K, 1%  [R0402]  85.78,25.96 0 top
ER106  49.9, 1%  [R0402]  99.87,32.05 180 top
ER107  49.9, 1%  [R0402]  99.87,31.04 180 top
ER108  49.9, 1%  [R0402]  99.87,26.97 0 top
ER109  49.9, 1%  [R0402]  99.87,27.99 0 top
ER110  100, 1%  [R0402]  85.78,34.09 180 top
ER111  100, 1%  [R0402]  85.78,33.07 180 top
ER112  100, 1%  [R0402]  85.78,32.05 180 top
ER113  100, 1%  [R0402]  85.78,31.04 180 top
ER114  100, 1%  [R0402]  99.87,21.89 180 top
ER115  470, 1%  [R0402]  99.87,37.13 0 top
ER116  100, 1%  [R0402]  85.78,35.1 180 top
ER117  470, 1%  [R0402]  99.87,22.91 0 top
ER118  100, 1%  [R0402]  85.78,29.01 180 top
ER119  100, 1%  [R0402]  88.01,24.94 180 top
ER120  10K, 1%  [R0402]  99.87,36.12 0 top
ER122  0, 1%  [R0402]  99.87,33.07 180 top
ER123  100, 1%  [R0402]  85.78,26.97 180 top
ER124  100, 1%  [R0402]  85.78,27.99 180 top
ER125  1M, 1%, DNI  [R0402]  93.98,38.58 180 top
ER126  0, 1%  [R0402]  93.47,33.53 90 top
ER127  10, 1%  [R0402]  94.49,33.53 90 top
ER128  12.1K, 1%  [R0402]  99.87,34.09 180 top
ER129  10K, 1%  [R0402]  85.78,24.94 180 top
F1  4A Fuse  [F1206W]  105.54,107.19 180 top
F3  MICROSMD010F-2  [FUS_MICROSMD010F_TYCO]  16.26,119.18 0 top
F4  MICROSMD010F-2  [FUS_MICROSMD010F_TYCO]  16.26,114.1 0 top
FB7  150ohm, 800mA  [C0805]  91.74,20.83 0 top
FUD1  FIDUCIAL  [FIDUCIAL_40MIL]  2.54,124.46 180 top
FUD2  FIDUCIAL  [FIDUCIAL_40MIL]  2.54,2.54 180 top
FUD3  FIDUCIAL  [FIDUCIAL_40MIL]  119.38,124.46 180 top
FUD4  FIDUCIAL  [FIDUCIAL_40MIL]  2.54,2.54 270 bottom
FUD5  FIDUCIAL  [FIDUCIAL_40MIL]  119.38,124.46 270 bottom
FUD6  FIDUCIAL  [FIDUCIAL_40MIL]  2.54,124.46 270 bottom
G1  CR2032V  [CR2032V]  103.76,100.51 270 top
IC1  [TO263-5]  71.75,115.57 0 top
IC2  ULN2003AD  [SO16]  75.69,53.85 0 top
IC3  L7824CT  [78XXL]  85.72,112.01 0 top
IC4  74HC165D  [SO16]  17.53,30.23 0 top
IC5  74HC165D  [SO16]  17.53,20.07 0 top
J1  [H2-2.54]  74.3,10.79 90 top
J2  [H2-2.54]  74.3,13.34 90 top
J3  6p-2.54  [H6-2.54]  19.56,97.28 270 top
J4  CTI-JTAG  [CTI-JTAG]  31.75,24.13 0 top
J6  [H2-2.54]  20.32,44.7 270 top
J7  TH-2X5  [H2X5-2.54]  47.62,5.71 270 top
J8  TH-2X5  [H2X5-2.54]  29.84,5.71 270 top
J11  [H2-2.54]  16.51,91.44 0 top
J12  [H2-2.54]  19.05,91.44 0 top
J13  [H2-2.54]  21.59,91.44 0 top
J21  [H2-2.54]  16.51,83.82 0 top
J22  [H2-2.54]  19.05,83.82 0 top
J23  [H2-2.54]  21.59,83.82 0 top
J31  [H2-2.54]  16.51,74.6 0 top
J32  [H2-2.54]  19.05,74.6 0 top
J33  [H2-2.54]  21.59,74.6 0 top
J41  [H2-2.54]  16.51,66.98 0 top
J42  [H2-2.54]  19.05,66.98 0 top
J43  [H2-2.54]  21.59,66.98 0 top
J51  [H2-2.54]  16.51,57.76 0 top
J52  [H2-2.54]  19.05,57.76 0 top
J53  [H2-2.54]  21.59,57.76 0 top
J61  [H2-2.54]  16.51,50.14 0 top
J62  [H2-2.54]  19.05,50.14 0 top
J63  [H2-2.54]  21.59,50.14 0 top
K1  JS1-24V-F  [JS-M]  95.73,87.63 0 top
K2  JS1-24V-F  [JS-M]  73.38,87.63 0 top
K3  JS1-24V-F  [JS-M]  95.73,71.25 0 top
K4  JS1-24V-F  [JS-M]  73.38,71.25 0 top
K5  JS1-24V-F  [JS-M]  95.73,54.86 0 top
L2  [MSS1260]  57.4,105.41 0 top
L3  78253/55MVC-R  [IND_78253_MC]  29.46,110.24 90 top
MGT1  MOUNTING_HOLE  [MOUNTING_HOLE]  85.72,123.19 180 top
MGT2  MOUNTING_HOLE  [MOUNTING_HOLE]  38.73,123.19 180 top
MGT3  MOUNTING_HOLE  [MOUNTING_HOLE]  85.72,3.17 180 top
MGT4  MOUNTING_HOLE  [MOUNTING_HOLE]  38.73,3.17 180 top
Q1  MMBT2907  [SOT23-BEC]  61.21,29.97 90 bottom
R1  10K, 1%  [R0402]  75.82,29.59 0 top
R2  1.5K, 1%  [R0402]  13.21,100.46 270 top
R3  10K, 1%  [R0402]  85.17,104.14 0 top
R4  0, 1%  [R0402]  56.92,45.03 90 top
R5  0, 1%  [R0402]  68.33,16.13 180 top
R6  100K, 1%, DNI  [R0402]  65.99,17.98 270 top
R8  1K, 1%  [R0402]  65.99,15.77 90 top
R9  1.5K, 1%  [R0402]  15.75,100.46 270 top
R10  0, 1%  [R0805]  109.73,13.21 180 top
R11  0, 1%  [R0402]  68.33,15.11 180 top
R12  1.5K, 1%  [R0402]  39.67,40.01 180 top
R13  1.5K, 1%  [R0402]  41.91,40.01 0 top
R15  40.2K, 1%  [R0402]  64.52,30.73 180 bottom
R17  1.00K, 1%  [R0805]  72.64,103.89 0 top
R18  4.75K, 1%  [R0402]  67.06,28.32 270 bottom
R19  0, 1%  [R0402]  48.31,21.87 270 bottom
R20  10K, 1%  [R0402]  62.61,32.38 90 bottom
R21  499  [R0402]  61.59,32.38 90 bottom
R22  4.75K, 1%  [R0402]  68.05,28.32 90 bottom
R24  1.5K, 1%  [R0402]  64.26,53.85 90 top
R25  0, 1%  [R0402]  63.75,43.56 90 bottom
R26  1.5K, 1%  [R0402]  115.58,15.88 180 top
R27  100K, 1%  [R0402]  49.81,45.42 90 bottom
R28  0, 1%  [R0402]  40.51,34.04 180 top
R29  0, 1%  [R0402]  40.51,33.02 180 top
R30  0, 1%  [R0402]  40.51,32 180 top
R31  22, 1%  [R0402]  40.51,30.99 180 top
R32  1M, 1%  [R0402]  72.64,25.65 270 top
R33  0, 1%  [R0402]  65.79,43.56 90 bottom
R34  .1, 0805  [R0805]  107.7,121.72 90 top
R35  1.5K, 1%  [R0402]  115.57,13.84 180 top
R36  1.5K, 1%  [R0402]  115.57,11.94 180 top
R37  1.5K, 1%  [R0402]  115.57,10.03 180 top
R38  1.5K, 1%  [R0402]  115.57,8.13 180 top
R39  4.75K, 1%  [R0402]  40.51,27.94 180 top
R40  4.75K, 1%  [R0402]  40.51,29.97 0 top
R41  4.75K, 1%  [R0402]  40.51,28.96 0 top
R42  10K, 1%  [R0402]  58.93,6.99 90 top
R43  10K, 1%  [R0402]  57.91,6.99 90 top
R44  10K, 1%  [R0402]  67.51,10.9 90 top
R45  10K, 1%  [R0402]  68.55,10.9 90 top
R46  10K, 1%  [R0402]  65.23,6.99 90 top
R47  10K, 1%  [R0402]  66.24,6.99 90 top
R48  10K, 1%  [R0402]  66.24,10.9 90 top
R49  10K, 1%  [R0402]  65.23,10.9 90 top
R50  10K, 1%  [R0402]  56.9,6.99 90 top
R51  10K, 1%  [R0402]  55.88,6.99 90 top
R52  10K, 1%  [R0402]  47.29,21.87 90 bottom
R53  100K, 1%  [R0402]  40.08,12.09 0 top
R54  100K, 1%, DNI  [R0402]  40.08,13.08 0 top
R55  100K, 1%  [R0402]  40.08,14.07 0 top
R56  100K, 1%  [R0402]  39.65,10.16 270 top
R57  100K, 1%  [R0402]  38.58,10.16 270 top
R58  100K, 1%  [R0402]  37.52,10.16 270 top
R59  100K, 1%  [R0402]  36.45,10.16 270 top
R60  100K, 1%  [R0402]  35.38,10.16 270 top
R61  100K, 1%  [R0402]  34.32,10.16 270 top
R62  100K, 1%  [R0402]  33.25,10.16 270 top
R63  100K, 1%  [R0402]  32.18,10.16 270 top
R64  100K, 1%, DNI  [R0402]  31.11,10.16 270 top
R65  100K, 1%, DNI  [R0402]  30.05,10.16 270 top
R66  100K, 1%, DNI  [R0402]  28.98,10.16 270 top
R67  100K, 1%  [R0402]  27.91,10.16 270 top
R68  100K, 1%  [R0402]  26.85,10.16 270 top
R69  100, 1%  [R0402]  28.52,15.47 90 top
R70  100K, 1%, DNI  [R0402]  40.21,12.09 0 bottom
R71  100K, 1%  [R0402]  40.21,13.08 0 bottom
R72  100K, 1%, DNI  [R0402]  40.21,14.07 0 bottom
R73  100K, 1%, DNI  [R0402]  39.65,10.29 90 bottom
R74  100K, 1%, DNI  [R0402]  38.58,10.29 90 bottom
R75  100K, 1%, DNI  [R0402]  37.52,10.29 90 bottom
R76  100K, 1%, DNI  [R0402]  36.45,10.29 90 bottom
R77  100K, 1%, DNI  [R0402]  35.38,10.29 90 bottom
R78  100K, 1%, DNI  [R0402]  34.32,10.29 90 bottom
R79  100K, 1%, DNI  [R0402]  33.25,10.29 90 bottom
R80  100K, 1%, DNI  [R0402]  32.18,10.29 90 bottom
R81  100K, 1%  [R0402]  31.11,10.29 90 bottom
R82  100K, 1%  [R0402]  30.05,10.29 90 bottom
R83  100K, 1%  [R0402]  28.98,10.29 90 bottom
R84  100K, 1%, DNI  [R0402]  27.91,10.29 90 bottom
R85  100K, 1%, DNI  [R0402]  26.85,10.29 90 bottom
R86  10K, 1%  [R0402]  3.94,37.72 180 top
R87  10K, 1%  [R0402]  3.94,39.75 180 top
R88  10K, 1%  [R0402]  3.94,40.77 180 top
R89  10K, 1%  [R0402]  3.94,41.78 180 top
R90  10K, 1%  [R0402]  3.94,42.8 180 top
R91  10K, 1%  [R0402]  3.94,38.73 180 top
R92  10K, 1%  [R0402]  19.2,40.39 90 top
R93  3.09K, 1%  [R0805]  72.64,101.83 180 top
R94  100, 5% DNI  [R0805]  72.64,99.75 180 top
R95  1.5K, 1%  [R0402]  67.31,53.85 270 top
R96  1.5K, 1%  [R0402]  66.29,53.85 270 top
R158  100K, 1%  [R0402]  78.87,41.15 180 top
R160  10K, 1%  [R0402]  74.04,41.15 180 top
R161  10K, 1%  [R0402]  76.45,47.73 0 top
R171  10K, 1%  [R0402]  109.22,87.63 180 top
R172  10K, 1%  [R0402]  109.22,80.01 180 top
R173  10K, 1%  [R0402]  109.22,72.39 180 top
R174  10K, 1%  [R0402]  109.22,64.77 180 top
R175  10K, 1%  [R0402]  109.22,57.15 180 top
R181  47V 200A  [CT/CN1206]  12.7,91.44 270 top
R182  47V 200A  [CT/CN1206]  12.7,83.82 270 top
R183  47V 200A  [CT/CN1206]  12.7,74.6 270 top
R184  47V 200A  [CT/CN1206]  12.7,66.98 270 top
R185  47V 200A  [CT/CN1206]  12.7,57.76 270 top
R186  47V 200A  [CT/CN1206]  12.7,50.14 270 top
R211  80, 0.1%  [0309/12]  36.83,90.42 180 top
R212  10K, 1%  [R0805]  26.42,89.41 0 top
R213  2K, 1%  [R0805]  26.42,91.44 0 top
R214  10K, 1%  [R0805]  26.42,93.47 0 top
R221  80, 0.1%  [0309/12]  36.83,82.8 180 top
R222  10K, 1%  [R0805]  26.42,81.79 0 top
R223  2K, 1%  [R0805]  26.42,83.82 0 top
R224  10K, 1%  [R0805]  26.42,85.85 0 top
R231  80, 0.1%  [0309/12]  36.83,73.58 180 top
R232  10K, 1%  [R0805]  26.42,72.57 0 top
R233  2K, 1%  [R0805]  26.42,74.6 0 top
R234  10K, 1%  [R0805]  26.42,76.63 0 top
R241  80, 0.1%  [0309/12]  36.83,65.96 180 top
R242  10K, 1%  [R0805]  26.42,64.95 0 top
R243  2K, 1%  [R0805]  26.42,66.98 0 top
R244  10K, 1%  [R0805]  26.42,69.01 0 top
R251  80, 0.1%  [0309/12]  36.83,56.74 180 top
R252  10K, 1%  [R0805]  26.42,55.73 0 top
R253  2K, 1%  [R0805]  26.42,57.76 0 top
R254  10K, 1%  [R0805]  26.42,59.79 0 top
R261  80, 0.1%  [0309/12]  36.83,49.12 180 top
R262  10K, 1%  [R0805]  26.42,48.11 0 top
R263  2K, 1%  [R0805]  26.42,50.14 0 top
R264  10K, 1%  [R0805]  26.42,52.17 0 top
R281  10K, 1%  [R0402]  3.94,36.7 0 top
R282  10K, 1%  [R0402]  3.94,35.69 0 top
R283  10K, 1%  [R0402]  3.94,34.67 0 top
R284  10K, 1%  [R0402]  3.94,33.66 0 top
R285  10K, 1%  [R0402]  3.94,29.59 0 top
R286  10K, 1%  [R0402]  3.94,30.61 0 top
R287  10K, 1%  [R0402]  3.94,31.62 0 top
R288  10K, 1%  [R0402]  3.94,32.64 0 top
R291  10K, 1%  [R0402]  27.51,15.47 270 top
R292  10K, 1%  [R0402]  26.49,15.47 270 top
R293  10K, 1%  [R0402]  25.48,15.47 270 top
R294  10K, 1%  [R0402]  24.46,15.47 270 top
RTC1  DS3231M  [SO08]  60.71,53.85 0 top
S1  KMR231GLFS  [SW4SMD_63X161LS]  117.47,4.98 180 top
S2  KMR231GLFS  [SW4SMD_63X161LS]  109.86,4.98 180 top
S11  [P101]  5.46,23.24 90 top
S12  [P101]  5.46,12.57 90 top
S13  [DS-04]  16.89,8.51 0 top
TP1  TPB0,65  [TP_B0,65]  57.78,34.54 180 bottom
TP2  TPB0,65  [TP_B0,65]  57.78,33.53 180 bottom
TP3  TPB0,65  [TP_B0,65]  61.85,34.57 180 bottom
TP4  TPB0,65  [TP_B0,65]  62.87,34.57 180 bottom
TP5  TESTPAD/W_HOLE_1X1  [TESTPAD/W_HOLE_1X1]  90.81,6.99 180 top
TP6  TESTPAD/W_HOLE_1X1  [TESTPAD/W_HOLE_1X1]  93.34,6.99 180 top
TP7  TESTPAD/W_HOLE_1X1  [TESTPAD/W_HOLE_1X1]  90.81,4.45 180 top
TP8  TESTPAD/W_HOLE_1X1  [TESTPAD/W_HOLE_1X1]  93.34,4.45 180 top
TP9  TESTPAD/W_HOLE_1X1  [TESTPAD/W_HOLE_1X1]  63.75,48.79 180 top
TP10  TESTPAD/W_HOLE_1X1  [TESTPAD/W_HOLE_1X1]  66.29,48.79 180 top
TP12  TPB0,65  [TP_B0,65]  59.82,34.57 180 bottom
TP13  TPB0,65  [TP_B0,65]  63.88,34.57 180 bottom
TP14  TPB0,65  [TP_B0,65]  72.97,16.59 180 top
TP15  TPB0,65  [TP_B0,65]  63.88,33.02 180 bottom
TP16  TPB0,65  [TP_B0,65]  60.07,32.99 180 bottom
TP21  TPB0,65  [TP_B0,65]  65.05,25.65 180 bottom
TP22  TPB0,65  [TP_B0,65]  56.11,20.32 180 bottom
TP23  TPB0,65  [TP_B0,65]  57.91,28.57 180 bottom
TP24  TPB0,65  [TP_B0,65]  60.83,34.57 180 bottom
TP26  TESTPAD/W_HOLE_1X1  [TESTPAD/W_HOLE_1X1]  68.02,20.47 180 top
TP27  TPB0,65  [TP_B0,65]  72.67,45.09 180 top
TP28  TPB0,65  [TP_B0,65]  72.67,46.35 180 top
TP29  TPB0,65  [TP_B0,65]  80.24,43.81 180 top
TP30  TPB0,65  [TP_B0,65]  80.24,42.55 180 top
U1  OSD3358-512M-BSM  [OSD335X-BGA-256]  61.34,32 270 top
U2  TPD4S012_DRY_6_P1_M  [DRY6]  111.91,10.59 0 bottom
U3  SN74LVC1G07_DCK_5  [DCK5]  71.37,16.51 270 top
U4  APX811SOT  [SOT143-R]  68.07,18.03 270 top
U5  TLVH431  [SOT23-3]  63.88,28.45 0 bottom
U6  SN74LVC2G241_DCU_8  [DCU8]  53.37,45.62 180 bottom
U7  [MICRON_EMMC_153]  48.18,14.81 270 top
U8  LAN8710  [LAN8710A-QFN32]  93.98,28.7 180 top
U16  AT97SC3205T-G3M4400B  [QFN32-0.4-4X4MM]  40.39,43.18 180 top
U21  S25FL127S  [W-PDFN-8]  76.45,44.45 180 top
U25  ISO3086TDW  [DW16]  43.18,109.47 90 top
U26  LP2985A-33DBVR  [DBV5]  35.56,117.35 270 top
U27  TCAN1051HV  [BEAGLEBONE_BLUE_D8]  93.85,43.18 0 top
U$2  [XYZ-LABEL]  48.13,28.32 180 top
U$3  MCP6002SMT  [SOIC8]  47.96,87.66 180 top
U$4  MCP6001  [SOT23-5]  54.61,70.87 0 top
U$5  MCP6002SMT  [SOIC8]  47.96,70.79 180 top
U$6  MCP6002SMT  [SOIC8]  47.93,53.95 180 top
U$8  [OSHW_8MM]  31.11,40.64 0 top
X1  10118192-0001LF  [10118192-0001LF(MICRO-USB-B-AMPHENOL-FCI)]  120.47,10.46 270 bottom
X2  MC2  [MC2]  8.13,100.66 270 top
X3  DM3BT-DSF-PEJS  [DM3BT-DSF-PEJS]  0.25,37.21 90 bottom
X4  J0011D01BNL  [SI-50170]  115.32,29.84 270 top
X7  MSTBA2  [MSTBA2]  116.84,116.05 90 top
X8  MC10  [MC10]  113.77,76.2 90 top
X9  MC4  [MC4]  8.13,87.63 270 top
X10  MC4  [MC4]  8.13,70.79 270 top
X11  MC4  [MC4]  8.13,53.95 270 top
X12  MC3  [MC3]  113.79,48.01 90 top
X13  MSTBA3  [MSTBA3]  5.08,114.1 270 top
Y2  7A-24.000MAAJ-T  [CRYSTAL-TXC-7A]  75.82,25.65 90 top
Y7  7A-25.000MAAE-T  [CRYSTAL-TXC-7A]  93.98,36.37 0 top

## Library data of the parts
C1-C3 C6-C22 C79 C85 C87 C88 C93 D1 D4-D7 FUD1-FUD6 J1 J2 J4 MGT1-MGT4 Q1 R1 R4-R6 R8 R10-R13 R15 R18-R22 R25-R92 R158 R160 R161 S1 S2 TP1-TP10 TP12-TP16 TP21-TP24 TP26-TP28 U4 U5 U7 U16 U21 U$2 X1 Y2 = OSD3358-BSP Ref Design
C4 C41-C45 C97 C111 C121 C131 C141 C151 C161 D2 D8 D9 D13 D21-D25 EC30-EC42 ER98-ER120 ER122-ER129 F1 FB7 J6-J8 J11-J13 J21-J23 J31-J33 J41-J43 J51-J53 J61-J63 R2 R3 R9 R17 R24 R93-R96 R171-R175 R212-R214 R222-R224 R232-R234 R242-R244 R252-R254 R262-R264 R281-R288 R291-R294 TP29 TP30 U8 X3 Y7 = OSD3358-SM-RED Platform
C46 C95 C96 = SparkFun-Capacitors; PROD_ID: CAP-10300
C94 = SparkFun-Capacitors; PROD_ID: CAP-09538
D3 D10 D11 D14-D17 = diode
F3 F4 = MICROSMD010F-2; MANUFACTURER_PART_NUMBER: MICROSMD010F2; VENDOR: Littlefuse
G1 = battery
IC1 = linear
IC2 = uln-udn
IC3 = v-reg
IC4 IC5 = 74xx-eu
J3 = OSD3358-BSP Ref Design; MPN: P125-1106A1BS116A1
K1-K5 = relay; MF: FARNELL; MPN: JSM1-12V-5; OC_FARNELL: 910351; OC_NEWARK: 14J1764
L2 = inductor-coilcraft_l
L3 = murata_xfmr; MANUFACTURER_PART_NUMBER: 7825355MVCR; VENDOR: Murata
R181-R186 = varistor
R211 R221 R231 R241 R251 R261 = resistor
RTC1 = SparkFun-Clocks; PROD_ID: IC-11985
S11 S12 = switch-dil; OC_FARNELL: unknown; OC_NEWARK: unknown
S13 = switch-dil; OC_FARNELL: 9471570; OC_NEWARK: unknown
U1 = OSD3358-BSP Ref Design; OSD3358-SM: u1
U2 = OSD3358-BSP Ref Design; DATASHEETURL: http://www.ti.com/lit/gpn/TPD4S012; FAMILY_NAME: ESD Solution; GENERIC_PART_NUMBER: TPD4S012; INDUSTRY_STD_PKG_TYPE: SON; MANUFACTURER: Texas Instruments; MANUFACTURER_PART_NUMBER: tpd4s012_dry_6; PACKAGE_DESIGNATOR: DRY; PIN_COUNT: 6; VENDOR: Texas Instruments
U3 = OSD3358-BSP Ref Design; DATASHEETURL: http://www.ti.com/lit/gpn/SN74LVC1G07; FAMILY_NAME: LL BUFFER AND DRIVER WITH OPEN-DRAIN OUTPUT; GENERIC_PART_NUMBER: SN74LVC1G07; INDUSTRY_STD_PKG_TYPE: SC70; MANUFACTURER: Texas Instruments; MANUFACTURER_PART_NUMBER: sn74lvc1g07_dck_5; PACKAGE_DESIGNATOR: DCK; PIN_COUNT: 5; VENDOR: Texas Instruments
U6 = OSD3358-BSP Ref Design; DATASHEETURL: http://www.ti.com/lit/gpn/SN74LVC2G241; FAMILY_NAME: LL BUFFER AND DRIVER WITH 3-STATE OUTPUT; GENERIC_PART_NUMBER: SN74LVC2G241; INDUSTRY_STD_PKG_TYPE: US8; MANUFACTURER: Texas Instruments; MANUFACTURER_PART_NUMBER: sn74lvc2g241_dcu_8; PACKAGE_DESIGNATOR: DCU; PIN_COUNT: 8; VENDOR: Texas Instruments
U25 = ISO3086TDW; MANUFACTURER_PART_NUMBER: ISO3086TDW; VENDOR: Texas Instruments
U26 = LP2985A-33DBVR; MANUFACTURER_PART_NUMBER: LP2985A33DBVR; VENDOR: Texas Instruments
U27 = BeagleBone_Blue; DATASHEETURL: http://www.ti.com/lit/ds/symlink/tcan1051hv.pdf; DESCRIPTION: CAN Transceiver; FAMILY_NAME: CAN Transceiver; GENERIC_PART_NUMBER: TCAN1051HV; INDUSTRY_STD_PKG_TYPE: SOIC; MANUFACTURER: Texas Instruments; MANUFACTURER_PART_NUMBER: TCAN1051HVD; PACKAGE_DESIGNATOR: D; PIN_COUNT: 8; VENDOR: Texas Instruments
U$3-U$6 = adam - ics
U$8 = oshw
X2 X8-X12 = con-phoenix-381_l
X4 = OSD3358-SM-RED Platform; OC_FARNELL: unknown; OC_NEWARK: unknown
X7 = con-phoenix-508; MF: FARNELL; MPN: 1757242; OC_FARNELL: 3705171; OC_NEWARK: 71C4161
X13 = con-phoenix-508; MF: FARNELL; MPN: 1757255; OC_FARNELL: 3705183; OC_NEWARK: 71C4162

## Nets
1P8V_REF: R212.2 R222.2 R232.2 R242.2 R252.2 R262.2 U$3.8 U$4.1 U$4.4 U$5.8 U$6.8
5V_OUT: D13.C IC1.2 L2.1
24VAC: D3.A F1.2
24VAC_IN: F1.1 X7.1
24VAC_UNREG: C94.+ C95.1 D3.C IC1.1 IC3.IN
24VDC_AUX: D2.1 D21.1 D22.1 D23.1 D24.1 D25.1 IC2.9 IC3.OUT K1.1 K2.1 K3.1 K4.1 K5.1 X2.1 X2.2
AGND: C8.2 C9.2 C10.2 C111.2 C121.2 C131.2 C141.2 C151.2 C161.2 R25.2 R211.1 R213.2 R221.1 R223.2 R231.1 R233.2 R241.1 R243.2 R251.1 R253.2 R261.1 R263.2 U1.A9 U$3.4 U$4.2 U$5.4 U$6.4 X9.2 X9.4 X10.2 X10.4 X11.2 X11.4
AIN0: U1.A8
AIN1: U1.B8 U$3.1 U$3.2
AIN2: U1.B6 U$3.6 U$3.7
AIN3: U1.C6 U$5.1 U$5.2
AIN4: U1.C7 U$5.6 U$5.7
AIN5: U1.C8 U$6.1 U$6.2
AIN6: U1.C9 U$6.6 U$6.7
AIN7: U1.D6 U1.D7
B03_NO: K3.NO X8.6
B_UART0_RX: J3.4 R27.2 U6.2
B_UART0_TX: J3.5 U6.3
BAT_SENSE: TP6.P$1 U1.N7
BO1_C: K1.C X8.9
BO1_NO: K1.NO X8.10
BO2_C: K2.C X8.7
BO2_NO: K2.NO X8.8
BO3_C: K3.C X8.5
BO4_C: K4.C X8.3
BO4_NO: K4.NO X8.4
BO5_C: K5.C X8.1
BO5_NO: K5.NO X8.2
CGND: D10.A D11.A MGT1.P$1 MGT2.P$1 MGT3.P$1 MGT4.P$1 R34.2 R181.2 R182.2 R183.2 R184.2 R185.2 R186.2 X1.CGND1 X1.CGND2 X1.CGND3 X1.CGND4 X1.CGND5 X1.CGND6 X3.CGND1 X3.CGND2 X3.CGND3 X3.CGND4 X3.CGND5 X3.CGND6 X4.S1 X4.S2 X12.1
CLKOUT2: C2.2 J4.18 U1.B4
CRS: ER124.1 U8.14
EEPROM_WP: J1.1 U1.M2
EHRPWM1A: U1.P12
EHRPWM1B: U1.T13
EHRPWM2A: U1.T4
EHRPWM2B: U1.P5
EMMC_RSTN: R19.2 R52.1 U7.K5
EMMC_VCCI: C13.2 U7.C2
GND: C1.1 C2.1 C3.2 C6.1 C11.- C13.1 C14.2 C15.2 C16.1 C17.1 C18.1 C19.1 C20.1 C21.2 C22.2 C41.2 C42.2 C79.2 C85.2 C87.2 C88.2 C93.2 C94.- C95.2 C96.2 C97.2 D13.A EC30.2 EC31.2 EC32.2 EC33.2 EC34.2 EC35.2 EC36.2 EC37.2 EC38.2 EC39.2 EC40.2 EC41.2 EC42.2 ER101.2 ER102.2 ER103.2 ER104.2 ER115.1 ER117.1 ER120.1 ER128.1 ER129.2 G1.- IC1.3 IC1.5 IC1.6 IC2.8 IC3.GND IC4.8 IC4.15 IC5.3 IC5.4 IC5.5 IC5.6 IC5.8 IC5.15 J1.2 J2.2 J3.1 J4.4 J4.8 J4.10 J4.12 J4.16 J4.20 J6.2 R1.2 R2.2 R3.2 R6.1 R9.2 R17.1 R18.1 R26.2 R27.1 R34.1 R35.2 R36.2 R37.2 R38.2 R39.1 R53.1 R54.1 R55.1 R56.1 R57.1 R58.1 R59.1 R60.1 R61.1 R62.1 R63.1 R64.1 R65.1 R66.1 R67.1 R68.1 R158.2 R281.1 R282.1 R283.1 R284.1 R285.1 R286.1 R287.1 R288.1 R291.1 R292.1 R293.1 R294.1 S1.2 S1.4 S2.1 S2.3 TP8.P$1 U1.D8 U1.D9 U1.E5 U1.E6 U1.E7 U1.E8 U1.E9 U1.E10 U1.E11 U1.E12 U1.F5 U1.F12 U1.G5 U1.G12 U1.H4 U1.H5 U1.H12 U1.H13 U1.J4 U1.J5 U1.J12 U1.J13 U1.K5 U1.K12 U1.L5 U1.L12 U1.M5 U1.M6 U1.M7 U1.M8 U1.M9 U1.M10 U1.M11 U1.M12 U1.N8 U1.N9 U2.4 U3.3 U4.1 U6.1 U6.4 U7.C4 U7.E7 U7.G5 U7.H10 U7.K8 U7.N2 U7.N5 U7.P4 U7.P6 U8.33 U16.2 U16.5 U16.6 U16.9 U16.18 U16.19 U16.20 U16.21 U16.23 U16.24 U16.32 U21.4 U25.3 U27.2 X1.GND X3.6 X3.GND X4.8 X7.2
GPIO0_18: RTC1.3 U1.J15
GPIO0_26: U1.R5
GPIO0_27: U1.T5
GPIO1_12: IC2.2 U1.P6
GPIO1_13: IC2.3 U1.R6
GPIO1_14: IC2.4 U1.T6
GPIO1_15: IC2.5 U1.P7
GPIO1_16: U1.T12 U25.6 U25.7
GPIO1_28: U1.N14
GPIO1_29: U1.P3
GPIO2_1: U1.T7
GPIO3_21: IC2.1 U1.C4
HDMI_INT: U1.T15
HDMICLK_DISN: U1.T16
I2C0_SCL: R12.1 U1.C10 U1.D10 U16.29
I2C0_SDA: R13.1 U1.C11 U1.D11 U16.30
I2C2_SCL: R95.1 RTC1.8 U1.A10
I2C2_SDA: R96.1 RTC1.7 U1.B10
ISO_GND: C43.2 C44.2 C45.2 C46.2 D14.A D15.A L3.5 U25.9 U25.15 U26.2 X13.3
ISO_VIN: C44.1 C45.1 D16.C D17.C U26.1 U26.3
JTAG_EMU0: J4.13 R40.1 U1.E2
JTAG_EMU1: J4.14 R41.1 U1.E3
JTAG_TCK: J4.9 J4.11 U1.D1
JTAG_TDI: J4.3 U1.C1
JTAG_TDO: J4.7 U1.C2
JTAG_TMS: J4.1 U1.D2
JTAG_TRSTN: J4.2 R39.2 U1.D3
LCD_DATA0: J8.9 R68.2 R85.1 U1.G3
LCD_DATA1: J8.10 R67.2 R84.1 U1.G2
LCD_DATA2: J8.7 R66.2 R69.1 R83.1 U1.G1
LCD_DATA3: J8.8 R65.2 R82.1 U1.H3
LCD_DATA4: J8.5 R64.2 R81.1 U1.H2
LCD_DATA5: J8.6 R63.2 R80.1 U1.H1
LCD_DATA6: J8.3 R62.2 R79.1 U1.J3
LCD_DATA7: J8.4 R61.2 R78.1 U1.J2
LCD_DATA8: J8.1 R60.2 R77.1 U1.J1
LCD_DATA9: J8.2 R59.2 R76.1 U1.K3
LCD_DATA10: J7.10 R58.2 R75.1 U1.K2
LCD_DATA11: J7.8 R57.2 R74.1 U1.K1
LCD_DATA12: J7.9 R56.2 R73.1 U1.L3
LCD_DATA13: J7.7 R55.2 R72.1 U1.L2
LCD_DATA14: J7.5 R54.2 R71.1 U1.L1
LCD_DATA15: J7.6 R53.2 R70.1 U1.M3
LCD_DE: J7.4 R28.2
LCD_HSYNC: J7.3 R29.2
LCD_PCLK: J7.2 R31.2
LCD_VSYNC: J7.1 R30.2
LDO_PGOOD: TP22.TP U1.N4 U1.N5
MDIO_CLK: U1.D13 U8.17
MDIO_DATA: ER105.2 U1.E13 U8.16
MII1_COL: ER123.2 U1.F15
MII1_CRS: ER124.2 U1.F14
MII1_RXCLK: ER116.2 U1.E16
MII1_RXD0: ER113.2 U1.E14
MII1_RXD1: ER112.2 U1.D16
MII1_RXD2: ER111.2 U1.D15
MII1_RXD3: ER110.2 U1.D14
MII1_RXDV: ER114.2 U1.F16
MII1_RXERR: ER118.2 U1.E15
MII1_TXCLK: ER119.2 U1.H16
MII1_TXD0: U1.H15 U8.22
MII1_TXD1: U1.H14 U8.23
MII1_TXD2: U1.G16 U8.24
MII1_TXD3: U1.G15 U8.25
MII1_TXEN: U1.G14 U8.21
MMC0_CD: J4.19 R92.1 U1.C14 X3.CD
MMC0_CLK: R88.1 U1.B15 X3.5
MMC0_CMD: R87.1 U1.B16 X3.3
MMC0_DAT0: R89.1 U1.A16 X3.7
MMC0_DAT1: R90.1 U1.A15 X3.8
MMC0_DAT2: R86.1 U1.C16 X3.1
MMC0_DAT3: R91.1 U1.C15 X3.2
MMC1_CLK: R51.1 U1.P2 U7.M6
MMC1_CMD: R50.1 U1.P1 U7.M5
MMC1_DAT0: R42.1 U1.R3 U7.A3
MMC1_DAT1: R43.1 U1.R2 U7.A4
MMC1_DAT2: R44.1 U1.R1 U7.A5
MMC1_DAT3: R45.1 U1.T3 U7.B2
MMC1_DAT4: R46.1 U1.T2 U7.B3
MMC1_DAT5: R47.1 U1.T1 U7.B4
MMC1_DAT6: R48.1 U1.P4 U7.B5
MMC1_DAT7: R49.1 U1.R4 U7.B6
MODE2: ER99.2 ER123.1 U8.15
N$1: R10.1 X1.VBUS
N$2: D7.2 R38.1
N$3: J6.1 R69.2
N$5: R8.2 U4.2
N$6: TP1.TP U1.F4
N$7: D2.2 R3.1
N$8: D1.2 R26.1
N$9: R15.2 R20.1 U5.1
N$10: Q1.B R21.1 U5.2
N$11: D6.2 R37.1
N$13: D5.2 R36.1
N$14: J11.1 J12.1 R181.1 R214.1 X9.1
N$15: D4.2 R35.1
N$16: D10.C U27.7 X12.3
N$17: D11.C U27.6 X12.2
N$18: TP2.TP U1.G4
N$19: TP3.TP U1.F13
N$21: TP4.TP U1.G13
N$22: R4.1 U1.A4
N$23: R161.2 U21.3
N$24: J51.1 J52.1 R185.1 R254.1 X11.1
N$25: R160.2 U21.7
N$26: R19.1 U1.R13
N$27: R11.1 S1.1 S1.3
N$28: C151.1 J53.1 R254.2 U$6.3
N$29: J51.2 R251.2
N$30: R5.1 U3.4
N$31: J53.2 R253.1
N$32: J52.2 R252.1
N$33: R1.1 U1.M16
N$34: J61.1 J62.1 R186.1 R264.1 X11.3
N$35: D8.2 R2.1
N$36: EC40.1 ER122.2 X4.4 X4.5
N$37: D21.2 R171.1
N$38: D23.2 R173.1
N$39: D22.2 R172.1
N$40: IC2.16 K1.2 R171.2
N$41: IC2.15 K2.2 R172.2
N$42: C161.1 J63.1 R264.2 U$6.5
N$43: D24.2 R174.1
N$44: D25.2 R175.1
N$45: J11.2 R211.2
N$46: J12.2 R212.1
N$47: J61.2 R261.2
N$48: J63.2 R263.1
N$49: J62.2 R262.1
N$50: IC2.13 K4.2 R174.2
N$51: IC2.12 K5.2 R175.2
N$52: IC2.14 K3.2 R173.2
N$54: J13.2 R213.1
N$55: J21.1 J22.1 R182.1 R224.1 X9.3
N$56: C121.1 J23.1 R224.2 U$3.5
N$57: G1.+ RTC1.6
N$59: IC4.6 R288.2 S12.8
N$60: C111.1 J13.1 R214.2 U$3.3
N$61: J21.2 R221.2
N$62: J23.2 R223.1
N$63: J22.2 R222.1
N$64: D9.2 R9.1
N$65: C4.1 R94.1
N$66: J31.1 J32.1 R183.1 R234.1 X10.1
N$67: C131.1 J33.1 R234.2 U$5.3
N$68: J31.2 R231.2
N$69: J33.2 R233.1
N$70: R31.1 U1.F1
N$71: J32.2 R232.1
N$72: R30.1 U1.F3
N$73: J41.1 J42.1 R184.1 R244.1 X10.3
N$74: C141.1 J43.1 R244.2 U$5.5
N$75: J41.2 R241.2
N$76: J43.2 R243.1
N$77: C4.2 IC1.4 R17.2 R93.1
N$78: J42.2 R242.1
N$79: D14.C F3.2 U25.11 U25.14
N$80: D15.C F4.2 U25.12 U25.13
N$81: F3.1 X13.1
N$82: F4.1 X13.2
N$83: R29.1 U1.F2
N$84: C43.1 C46.1 U25.16 U26.5
N$85: R28.1 U1.E1
N$87: D16.A L3.6
N$88: D17.A L3.4
N$89: L3.1 U25.1
N$90: L3.3 U25.2
N$91: IC4.5 R287.2 S12.4
N$92: IC4.4 R286.2 S12.2
N$93: IC4.3 R285.2 S12.1
N$94: IC4.14 R284.2 S11.8
N$95: IC4.13 R283.2 S11.4
N$96: IC4.12 R282.2 S11.2
N$97: IC4.11 R281.2 S11.1
N$98: IC5.11 R291.2 S13.8
N$99: IC5.12 R292.2 S13.7
N$100: IC5.13 R293.2 S13.6
N$101: IC5.14 R294.2 S13.5
N$102: IC4.10 IC5.9
N$113: ER126.1 U8.5
N$114: EC42.1 ER125.2 ER126.2 Y7.P$2
N$115: EC41.1 ER127.2 Y7.P$1
N$116: ER125.1 ER127.1 U8.4
N$117: ER128.2 U8.32
N$118: ER129.1 U8.18
N$123: ER120.2 U8.2 X4.A1
N$124: U8.3 X4.C2
N$125: EC33.1 EC35.1 U8.6
N$126: ER115.2 X4.C1
N$127: ER117.2 X4.A2
OSC0_GND: C7.2 C12.2 U1.N15
OSC0_IN: C12.1 R32.2 U1.P16 Y2.P$2
OSC0_OUT: C7.1 R32.1 U1.N16 Y2.P$1
OSC1_GND: RTC1.5 U1.B5
OSC1_IN: R24.2 RTC1.1 U1.A6
OSC1_OUT: U1.A5
PMIC_INT: TP24.TP U1.D4 U1.E4
PMIC_MUX_IN: R18.2 R22.1 U1.N13
PMIC_NRESET: J2.1 U1.M13
PMIC_NWAKEUP: TP23.TP U1.L4 U1.M4
PMIC_PGOOD: U1.N12 U1.P11 U3.2
PWR_BUT: S2.2 S2.4 U1.T11
PWR_EN: TP21.TP U1.N10 U1.N11
RESET: R5.2 R11.2 U4.3
RTC_RST: RTC1.4 U1.R12
RX_CLK: ER104.1 ER116.1 U8.7
RX_DV: ER114.1 U8.26
RX_ERR: ER101.1 ER118.1 U8.13
RX_N: EC37.1 ER107.2 U8.30 X4.2
RX_P: EC36.1 ER106.2 U8.31 X4.1
RXD0: ER98.2 ER113.1 U8.11
RXD1: ER100.2 ER112.1 U8.10
RXD2: ER103.1 ER111.1 U8.9
RXD3: ER102.1 ER110.1 U8.8
SPI0_CS0: R158.1 TP30.TP U1.A14 U21.1
SPI0_D0(MISO): TP29.TP U1.B13 U21.2
SPI0_D1(MOSI): TP28.TP U1.B14 U21.5
SPI0_SCLK: TP27.TP U1.A13 U21.6
SPI1_CS0: IC4.1 IC5.1 U1.B1
SPI1_D0: IC4.9 U1.A2
SPI1_D1: U1.B2
SPI1_SCLK: IC4.2 IC5.2 U1.A1
SYS_ADC_1P8V: C10.1 R33.2 U1.A7 U$4.3
SYS_RESETN: C14.1 J4.15 R6.2 R8.1 TP26.P$1 U1.R11 U8.19 U16.17
SYS_RTC_1P8V: Q1.C R15.1 TP14.TP U1.K11 U1.L11 U3.5 U5.3
SYS_VDD1_3P3V: C6.2 C15.1 C16.2 C17.2 C18.2 C19.2 C20.2 C21.1 C22.1 C41.1 C42.1 C79.1 C85.1 C87.1 C88.1 C93.1 C97.1 EC34.1 ER98.1 ER99.1 ER100.1 ER105.1 FB7.1 IC4.16 IC5.16 J4.5 L3.2 R12.2 R13.2 R22.2 R24.1 R40.2 R41.2 R42.2 R43.2 R44.2 R45.2 R46.2 R47.2 R48.2 R49.2 R50.2 R51.2 R52.2 R70.2 R71.2 R72.2 R73.2 R74.2 R75.2 R76.2 R77.2 R78.2 R79.2 R80.2 R81.2 R82.2 R83.2 R84.2 R85.2 R86.2 R87.2 R88.2 R89.2 R90.2 R91.2 R92.2 R95.2 R96.2 R160.1 R161.1 RTC1.2 S11.C S12.C S13.1 S13.2 S13.3 S13.4 TP12.TP U1.F6 U1.F7 U1.G6 U1.G7 U4.4 U6.7 U6.8 U7.C6 U7.E6 U7.F5 U7.J10 U7.K9 U7.M4 U7.N4 U7.P3 U7.P5 U8.12 U16.1 U16.8 U16.22 U21.8 U25.4 U27.3 U$4.5 X3.4
SYS_VDD2_3P3V: D1.1 TP13.TP U1.F11 U1.G11
SYS_VDD3_3P3V: Q1.E R20.2 R21.2 TP16.TP U1.F8 U1.F9 U1.G8 U1.G9 U1.H7 U1.H8 U1.H9 U1.J7 U1.J8 U1.J9 U1.K8 U1.K9 U1.L8 U1.L9
SYS_VDD_1P8V: TP15.TP U1.F10 U1.G10 U1.H10 U1.H11 U1.J10 U1.J11 U1.K10 U1.L10
SYS_VOUT: U1.K6 U1.K7 U1.L6 U1.L7
TEMP_SENSE: TP7.P$1 U1.N6
TIMER4: U1.M1
TIMER5: U1.N3
TIMER6: U1.N2
TIMER7: U1.N1
TPM_GPIO0: U1.B3 U16.12
TPM_GPIO1: TP9.P$1 U1.C12 U16.3
TPM_GPIO2: TP10.P$1 U1.C13 U16.4
TX_CLK: ER119.1 U8.20
TX_N: EC39.1 ER109.2 U8.28 X4.6
TX_P: EC38.1 ER108.2 U8.29 X4.3
UART0_RX: U1.A12 U6.6
UART0_TX: U1.B12 U6.5
UART1_RXD: U1.A11 U27.4
UART1_TXD: U1.B11 U27.1
UART4_RXD: D9.1 U1.P15 U25.5
UART4_TXD: D8.1 U1.R16 U25.8
USB0_DM: U1.K16 U2.1 X1.D-
USB0_DP: U1.K15 U2.2 X1.D+
USB0_ID: U1.K14 U2.3 X1.ID
USB1_OCN: U1.R15
USR0: D7.1 U1.P13
USR1: D6.1 U1.T14
USR2: D5.1 U1.R14
USR3: D4.1 U1.P14
VDD_5V: C11.+ C96.1 L2.2 R93.2 R94.2 U1.P10 U1.R10 U1.T10
VDD_BAT: TP5.P$1 U1.P8 U1.R8 U1.T8
VDD_ETH_PHY: EC30.1 EC31.1 EC32.1 ER106.1 ER107.1 ER108.1 ER109.1 ER122.1 FB7.2 U8.1 U8.27
VDD_USB_5V: C3.1 R10.2 U1.J16 U1.P9 U1.R9 U1.T9 U2.6
VIO: U27.5
VREFN: R25.1 U1.B9
VREFP: C8.1 C9.1 R33.1 U1.B7
XDMA_EVENT_INTR0: C1.2 J4.17 R4.2

## Tracks (layer width: path | path; a pad name or v marks a point on that pad's centre or on a via)
1P8V_REF  (via drill 0.3)
  Top 0.152: U$4.4 55.56,71.18 55.24,70.87 53.98,70.87 53.66,70.55 U$4.1 | U$5.8 51.63,67.64 51.94,67.95 51.94,68.47 52.26,68.78 52.88,68.78 U$4.1 | U$3.8 51.45,84.5 51.94,84.01 51.94,70.65 52.26,70.33 52.89,70.33 U$4.1 | U$6.8 51.63,50.8 51.94,51.11 51.94,66.1 52.26,66.42 53.09,66.42 53.66,67 U$4.1 | v28.73,89.41 R212.2 | v28.73,81.79 R222.2 | v28.73,72.57 R232.2 | v28.73,64.95 R242.2 | v28.73,55.73 R252.2 | v28.73,48.11 R262.2 | U$3.8 49.86,88.01 49.23,88.65 v43.18,88.65 | v43.18,81.03 49.23,81.03 49.86,81.66 U$3.8 | v43.18,47.35 49.2,47.35 49.84,47.98 U$6.8 | v43.18,54.97 49.2,54.97 49.84,54.33 U$6.8 | v43.16,64.16 49.23,64.16 49.86,64.8 U$5.8 | v43.18,71.78 49.23,71.78 49.86,71.14 U$5.8 | U$4.1
  Bottom 0.152: v28.73,48.11 29.49,47.35 v43.18,47.35 | v43.18,54.97 29.49,54.97 v28.73,55.73 | v43.16,64.16 29.52,64.16 v28.73,64.95 | v43.18,71.78 29.52,71.78 v28.73,72.57 | v43.18,81.03 29.49,81.03 v28.73,81.79 | v43.18,88.65 29.49,88.65 v28.73,89.41
5V_OUT
  pour Top: 56.98,117.2 53.07,117.2 52.76,116.88 52.76,107.18 53.07,106.86 60.39,106.86 60.71,106.54 60.71,105.13 60.76,105.08 61.01,104.83 70.4,104.83 70.56,104.99 70.56,111.06 70.24,111.38 69.48,111.38 69.16,111.06 69.16,107.1 68.85,106.78 63.72,106.78 63.4,107.1 63.4,112.51 63.08,112.83 57.62,112.83 57.3,113.14 57.3,116.88
24VAC
  pour Top: 105.26,108.52 105.26,105.73 104.94,105.41 97.4,105.41 97.08,105.73 97.08,108.52 97.4,108.84 104.94,108.84
24VAC_IN
  pour Top: 105.83,108.51 105.84,105.73 106.16,105.41 113.98,105.41 114.3,105.73 114.3,115.28 113.98,115.6 108.96,115.6 108.64,115.28 108.65,109.14 108.33,108.83 106.15,108.83
24VAC_UNREG  (via drill 0.3)
  other vias: 67.06,110.49 67.06,109.73 67.06,108.97 67.06,108.2 67.82,108.2 68.58,108.2 97.92,113.54 98.68,113.54 99.44,113.54 100.2,113.54 97.92,112.78 98.68,112.78 99.44,112.78 100.2,112.78
  pour Top: 101.04,117.67 101.04,109.88 100.72,109.56 97.4,109.56 97.08,109.88 97.08,117.67 97.4,117.98 100.72,117.98
  pour Bottom: 100.72,117.98 78.19,117.98 77.88,117.67 77.88,112.65 77.56,112.33 65.72,112.33 65.41,112.01 65.41,105.14 65.72,104.83 93.28,104.83 93.6,105.14 93.6,109.25 93.92,109.56 100.72,109.56 101.04,109.88 101.04,117.67
  pour Top: 64.12,107.19 68.54,107.19 68.86,107.51 68.86,111.07 68.54,111.39 65.75,111.39 65.41,111.73 65.41,116.14 65.09,116.46 61.35,116.46 61.04,116.14 61.04,113.53 61.35,113.21 63.49,113.21 63.8,112.89 63.8,107.51
24VDC_AUX
  Top 0.152: D2.1 88.27,102.11
  Top 0.305: K2.1 87.76,93.63 88.39,93 88.39,92.58 89.03,91.95 91.31,91.95 91.95,92.58 91.95,93 92.58,93.63 K1.1 109.84,93.63 110.48,93 D21.1 D22.1 110.48,77.72 | 110.48,77.72 D23.1 D24.1 110.48,62.56 | IC2.9 80.14,55.27 80.77,54.63 99.19,54.63 99.82,55.27 99.82,60.23 100.46,60.86 K5.1 102.43,61.92 103.07,62.56 110.48,62.56 | 110.48,62.56 D25.1 | K4.1 87.76,77.25 88.39,76.61 88.39,76.25 89.03,75.62 91.31,75.62 91.95,76.25 91.95,76.61 92.58,77.25 K3.1 107.07,77.25 107.54,77.72 110.48,77.72
  Top 0.813: IC3.OUT 88.27,102.11 88.27,98.35 87.63,97.71 80.72,97.71 80.08,97.08 K2.1 | X2.1 X2.2
  Bottom 0.813: X2.1 19.56,102.56 20.19,101.93 20.19,100.64 21.01,99.82 29.52,99.82 30.15,99.19 30.15,98.17 30.61,97.71 87.63,97.71 88.27,98.35 IC3.OUT
AGND  (via drill 0.3)
  Top 0.152: 61.95,41.55 U1.A9 | R211.1 43.18,92.84 42.55,93.47 C111.2 29.34,91.44 R213.2 | R223.2 29.34,83.82 C121.2 42.55,85.85 43.18,85.22 R221.1 | R233.2 29.34,74.6 C131.2 42.55,76.63 43.18,76 R231.1 | R243.2 29.34,66.98 C141.2 42.55,69.01 43.18,68.38 R241.1 | R253.2 29.34,57.76 C151.2 42.55,59.79 43.18,59.16 R251.1 | R263.2 29.34,50.14 C161.2 42.55,52.17 43.18,51.54 R261.1 | U$3.4 | 46.02,57.11 U$6.4 | 46.05,73.95 U$5.4
  Top 0.254: v46.05,92.43 U$3.4 | v46.02,58.73 46.02,57.11 | v46.05,75.56 46.05,73.95 | v54.61,68.45 U$4.2
  Bottom 0.152: C8.2 C9.2 66.8,43.74 66.62,43.56 64.92,43.56 64.77,43.41 C10.2 64.39,43 64.26,43.13 64.26,43.97 64.11,44.12 R25.2 v62.69,44.12
  other vias: 61.26,42.95 61.26,44.12
  pour Top: 62.26,41.25 61.8,41.25 61.52,41.53 61.39,41.53 60.78,42.14 60.78,44.25 61.06,44.53 62.89,44.53 63.14,44.27 63.14,43.76 62.89,43.51 62.38,43.51 62.26,43.38
  pour Route2: 2.21,47.02 2.59,46.63 54.99,46.63 59.31,42.32 61.67,42.32 62.31,42.95 62.31,43.22 62.62,43.54 62.95,43.54 63.27,43.85 63.27,47.65 62.18,48.74 60.68,48.74 60.22,49.2 60.22,53.92 59.59,54.56 57.05,54.56 56.41,55.19 56.41,94.72 55.78,95.35 2.84,95.35 2.21,94.72
AIN0  (via drill 0.3)
  Top 0.152: v59.92,47.7 59.92,44.68 60.35,44.25 60.35,42.22 60.71,41.86 U1.A8
AIN1  (via drill 0.3)
  Top 0.152: U$3.1 U$3.2 v48.59,92.43 | v60.1,39.88 60.33,39.88 U1.B8